# Altium PCB CPU-board-multi.PcbDoc (part 1 of 3)
Units mm, origin at the board's own origin, x right, y up, seen from the top; angles counter-clockwise.
Board outline 100 x 66.22 mm, 6 copper layers (L1, Power, L2, L3, CommonGND, L4), stack 2.134 mm thick; 307 components, 215 nets, 1002 pads, 415 vias.
Unrouted connection lines stored in the file: 11.
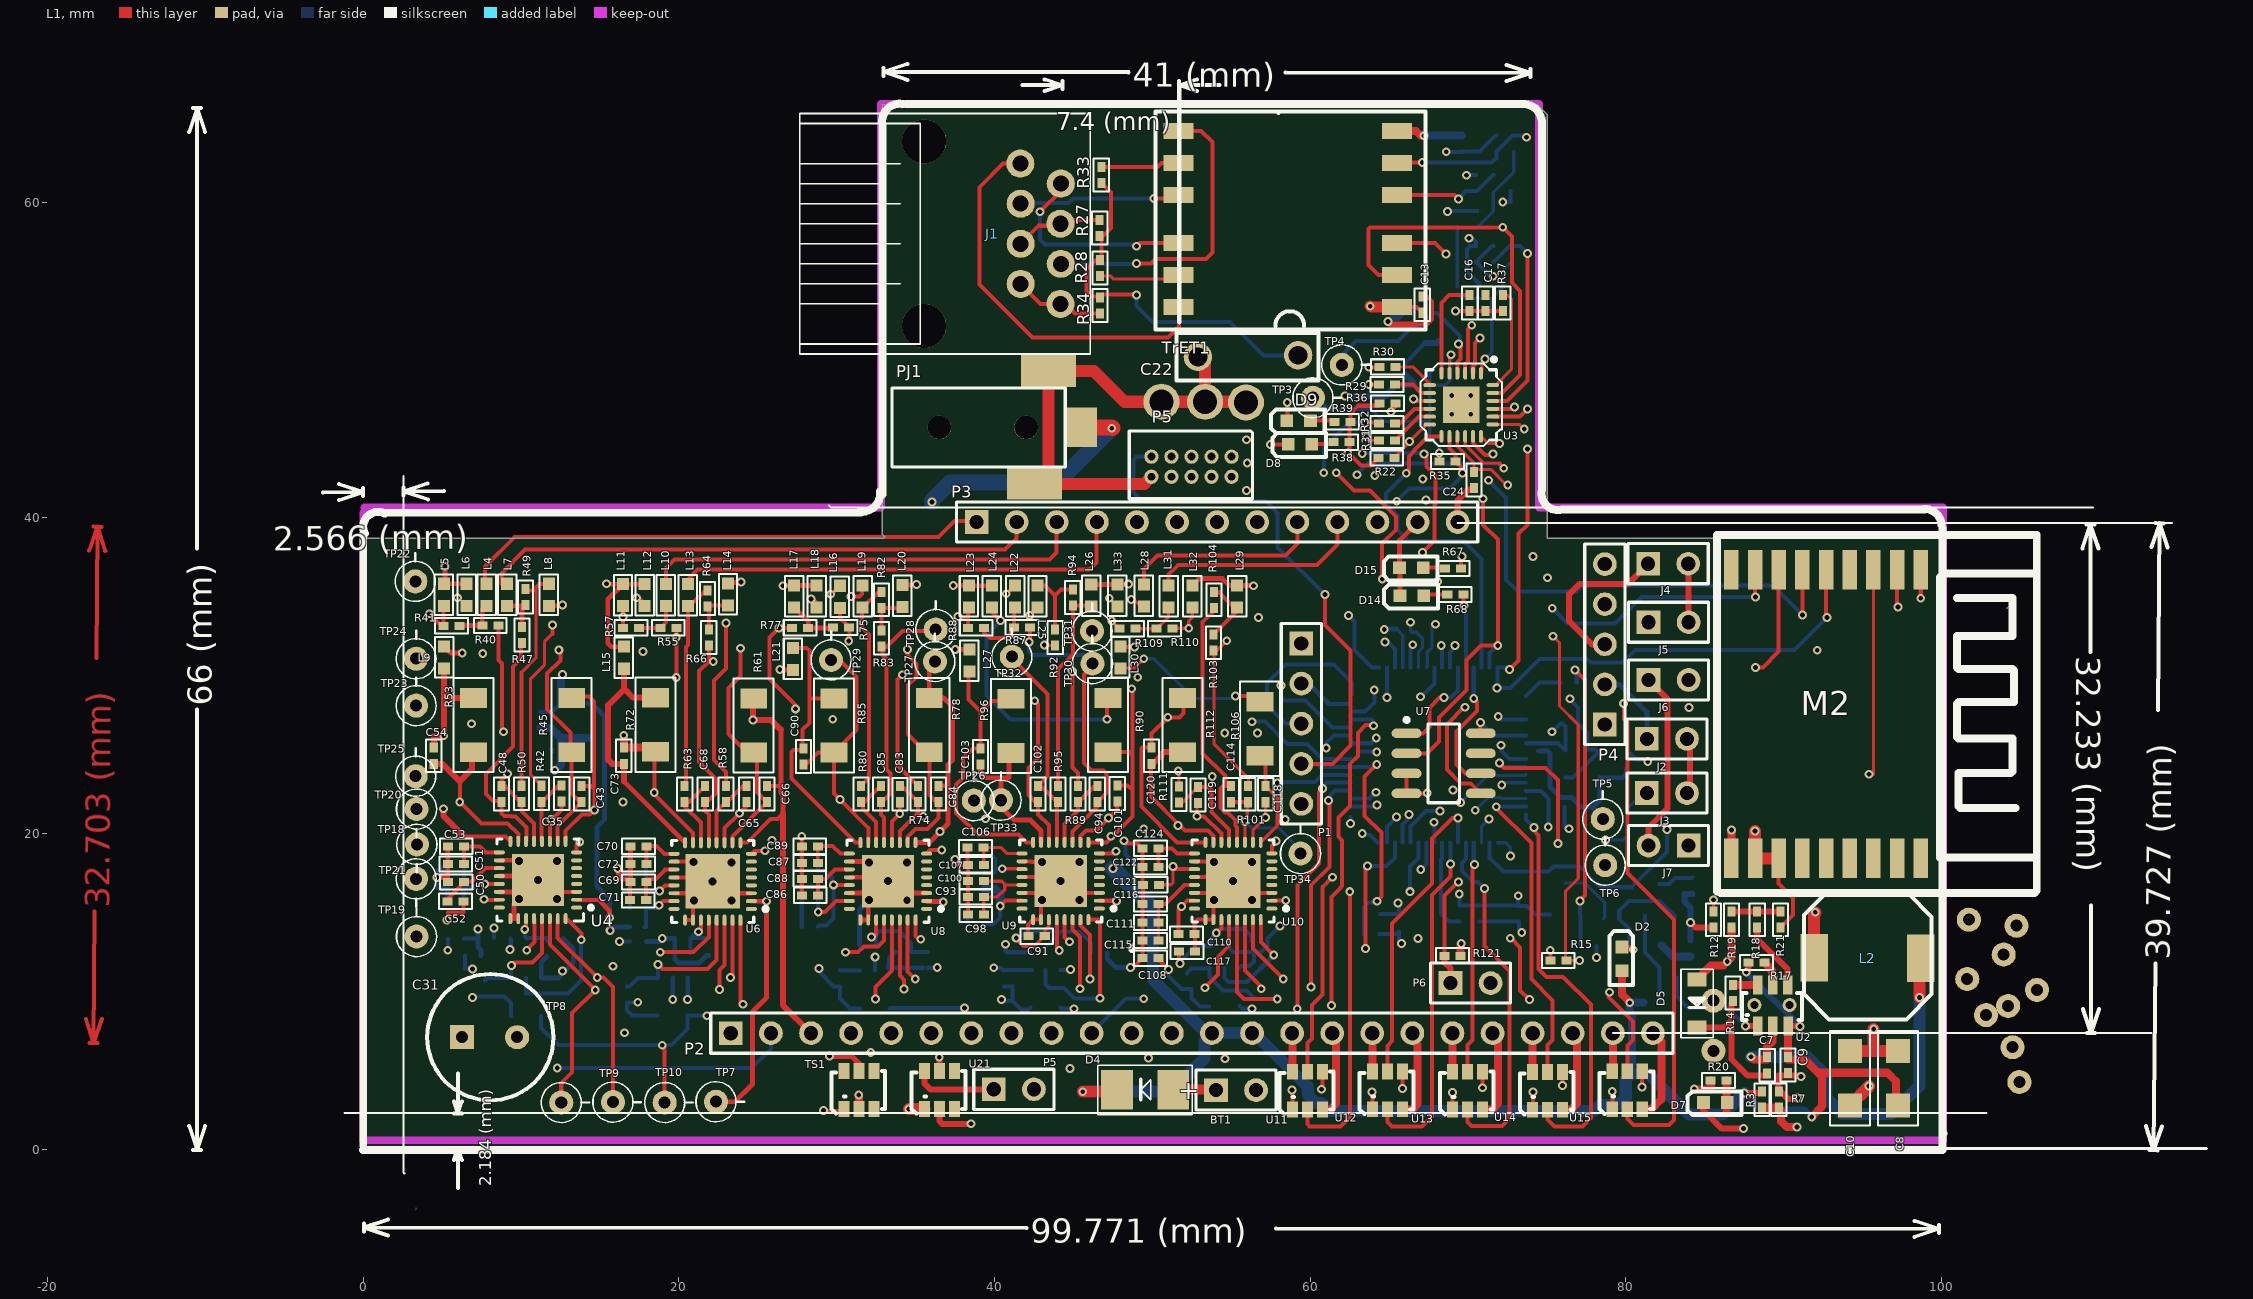
[diagram p0: L1 view]
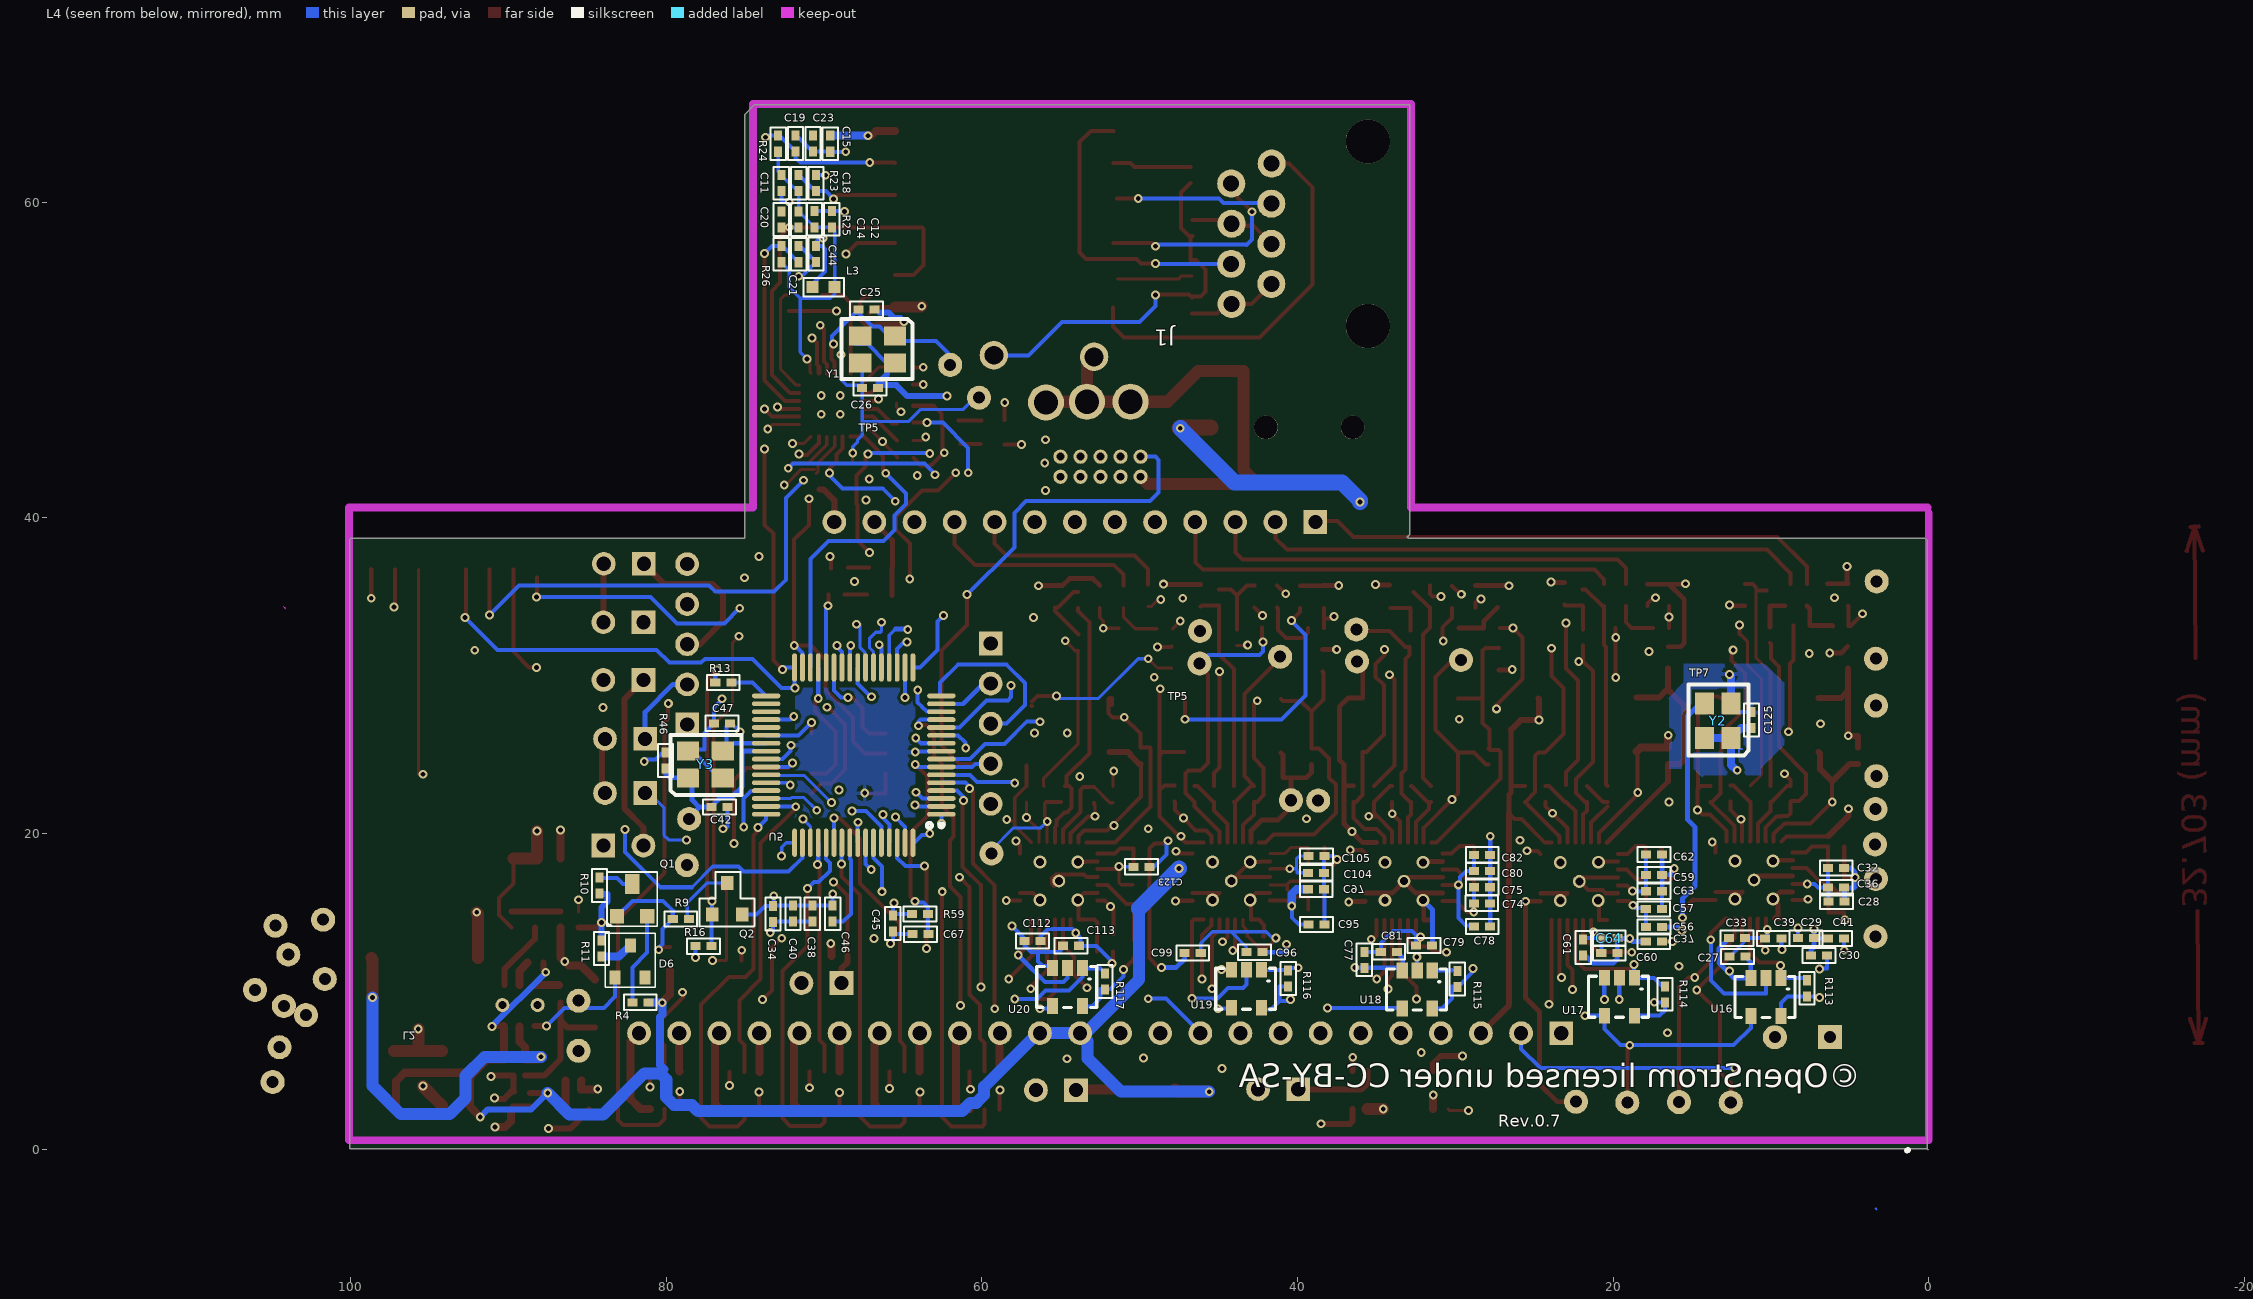
[diagram p1: L4 view, seen from below]
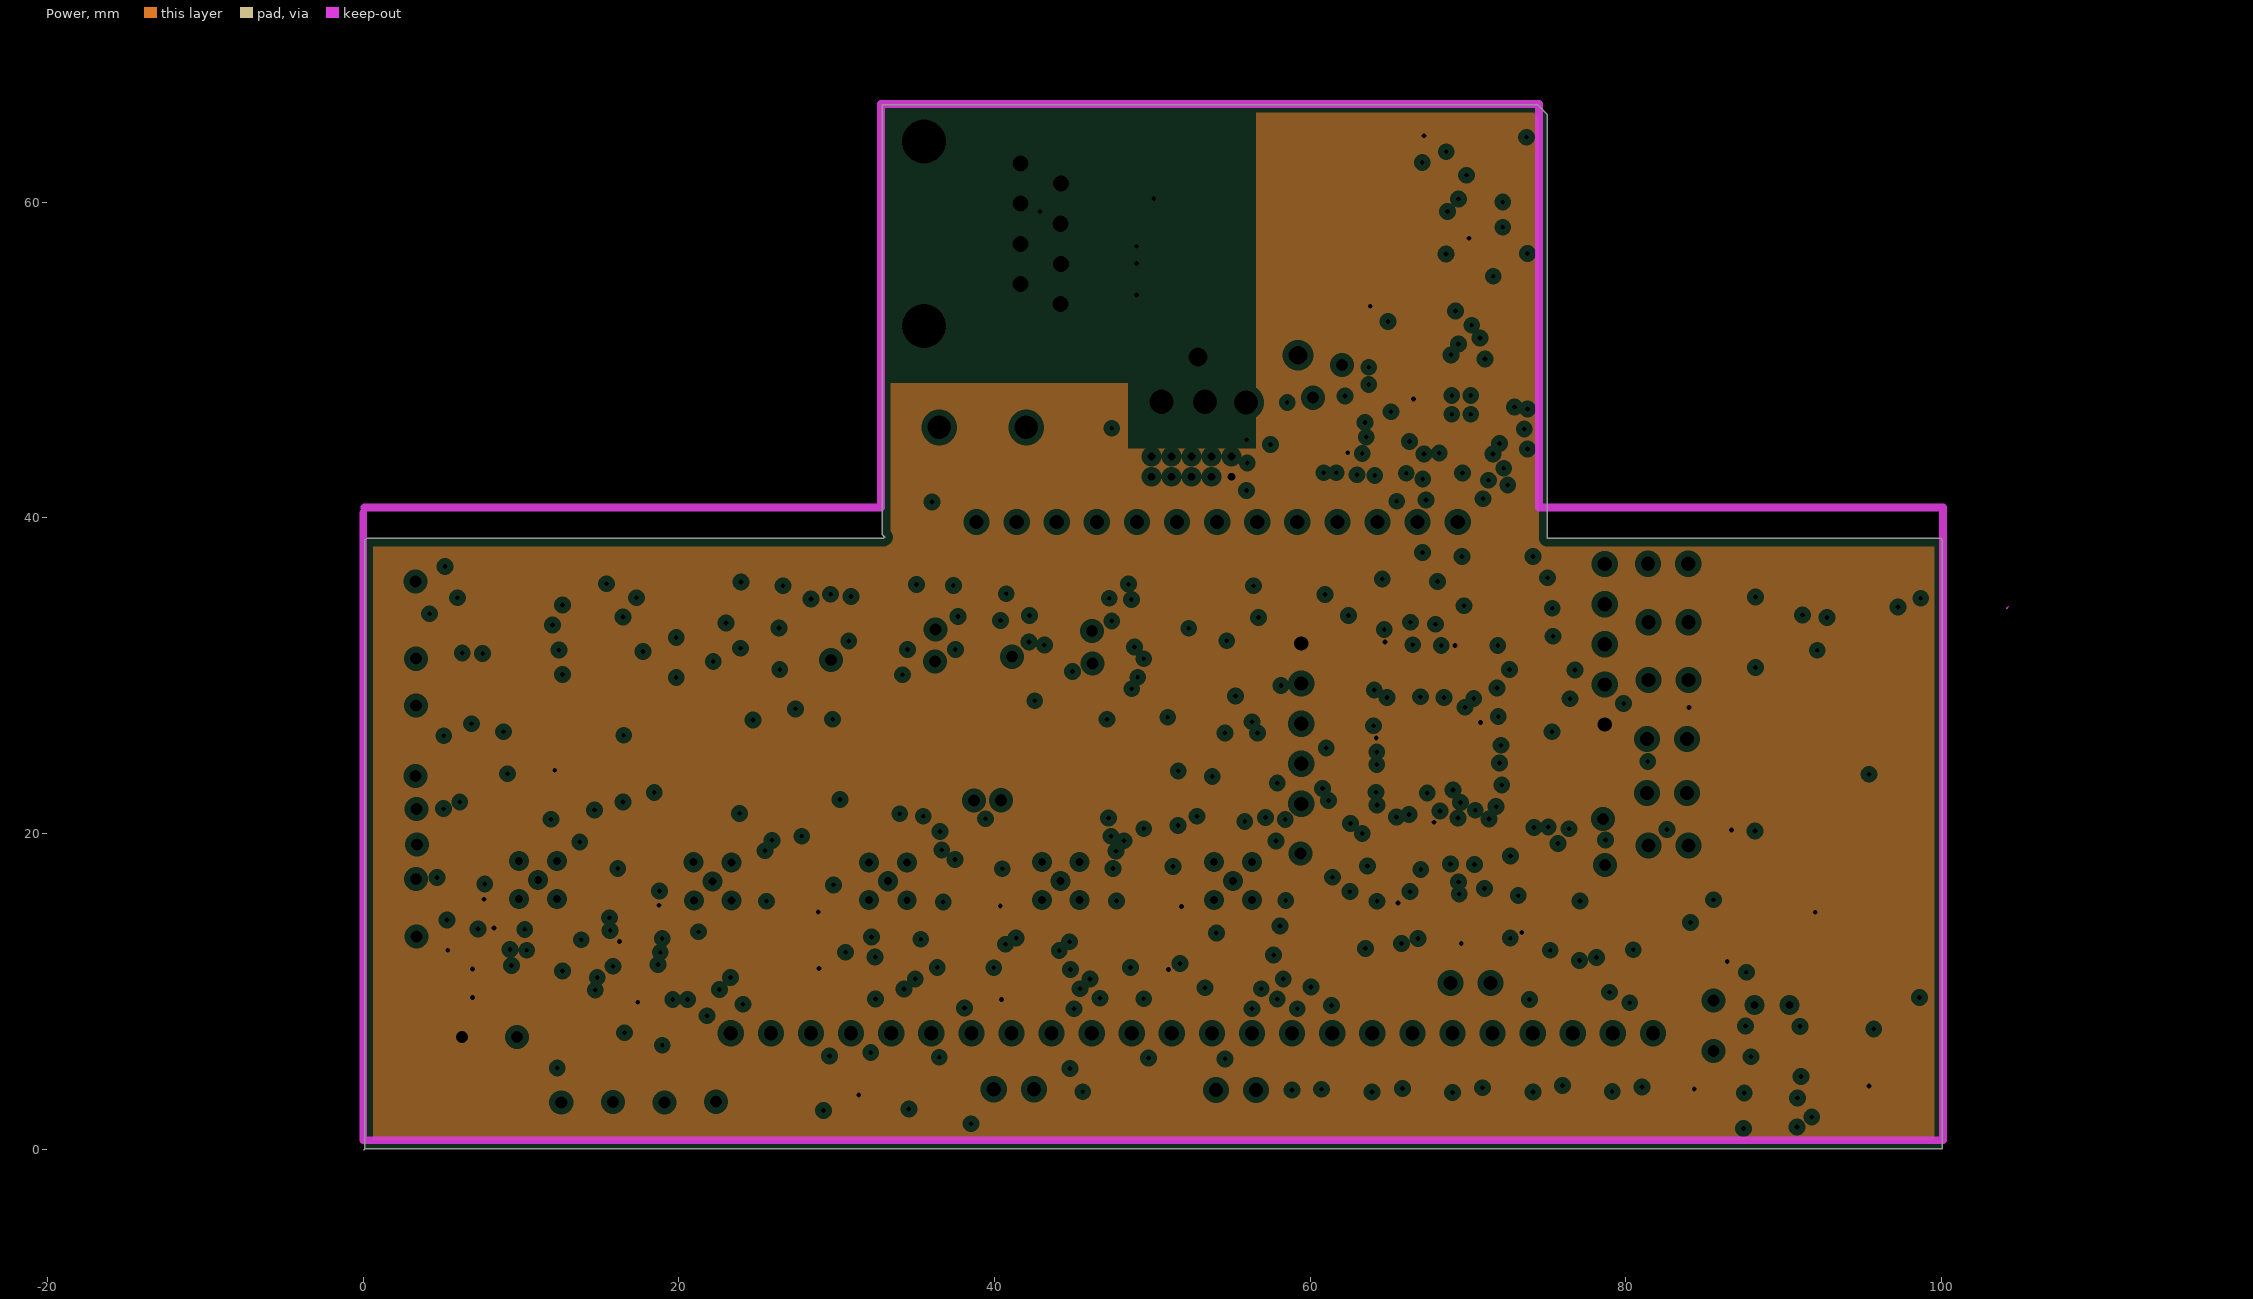
[diagram p2: Power, clearances drawn from the general rule]
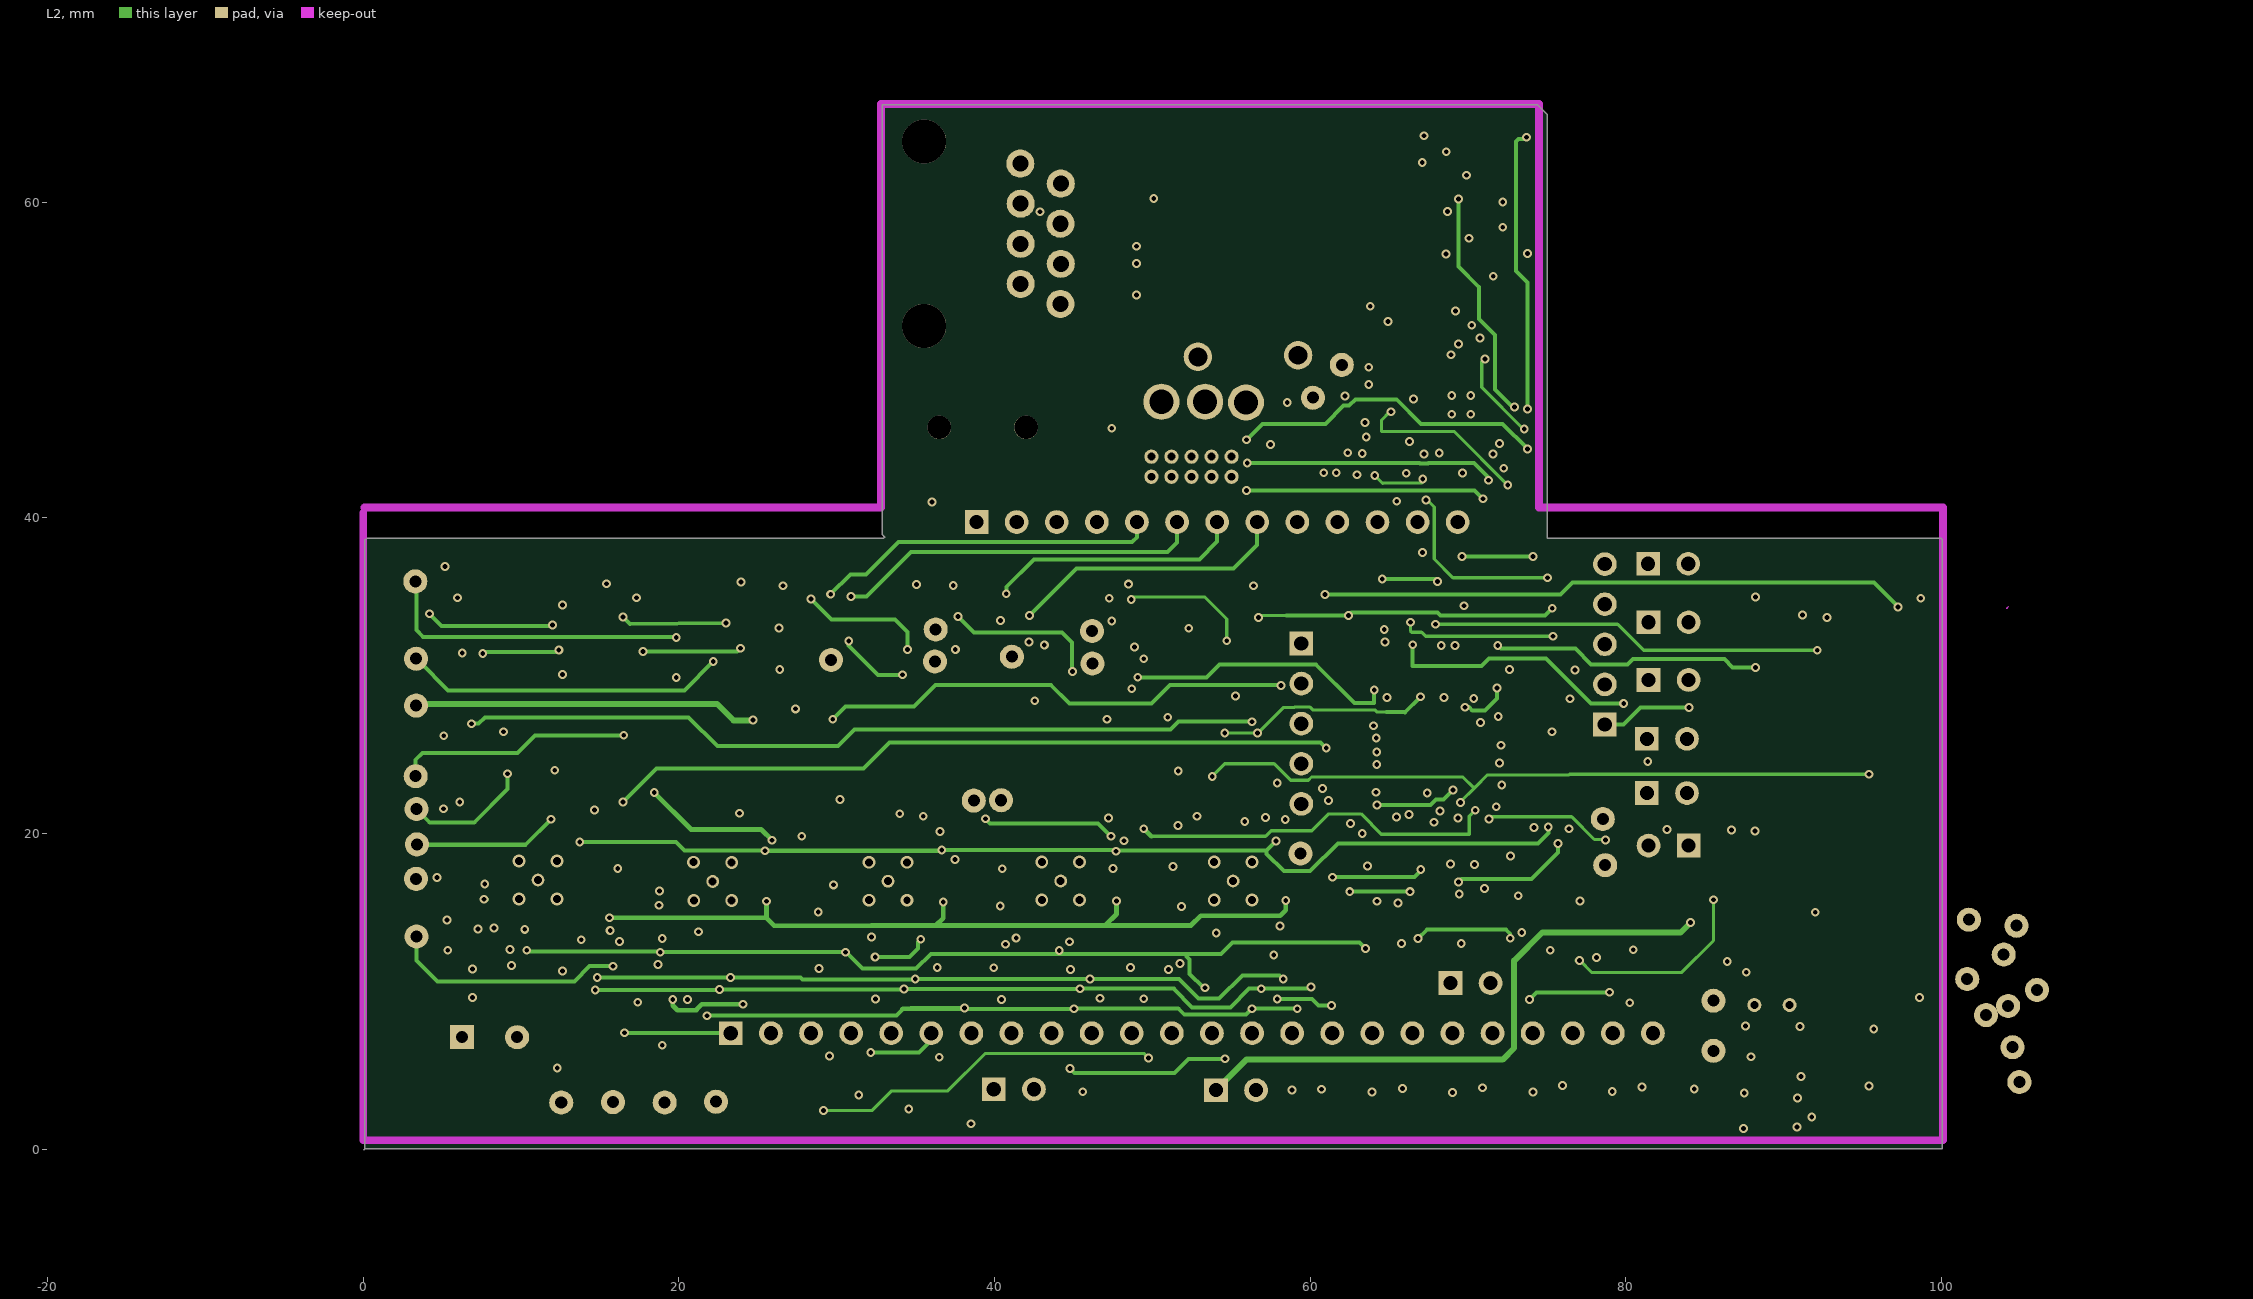
[diagram p3: L2]
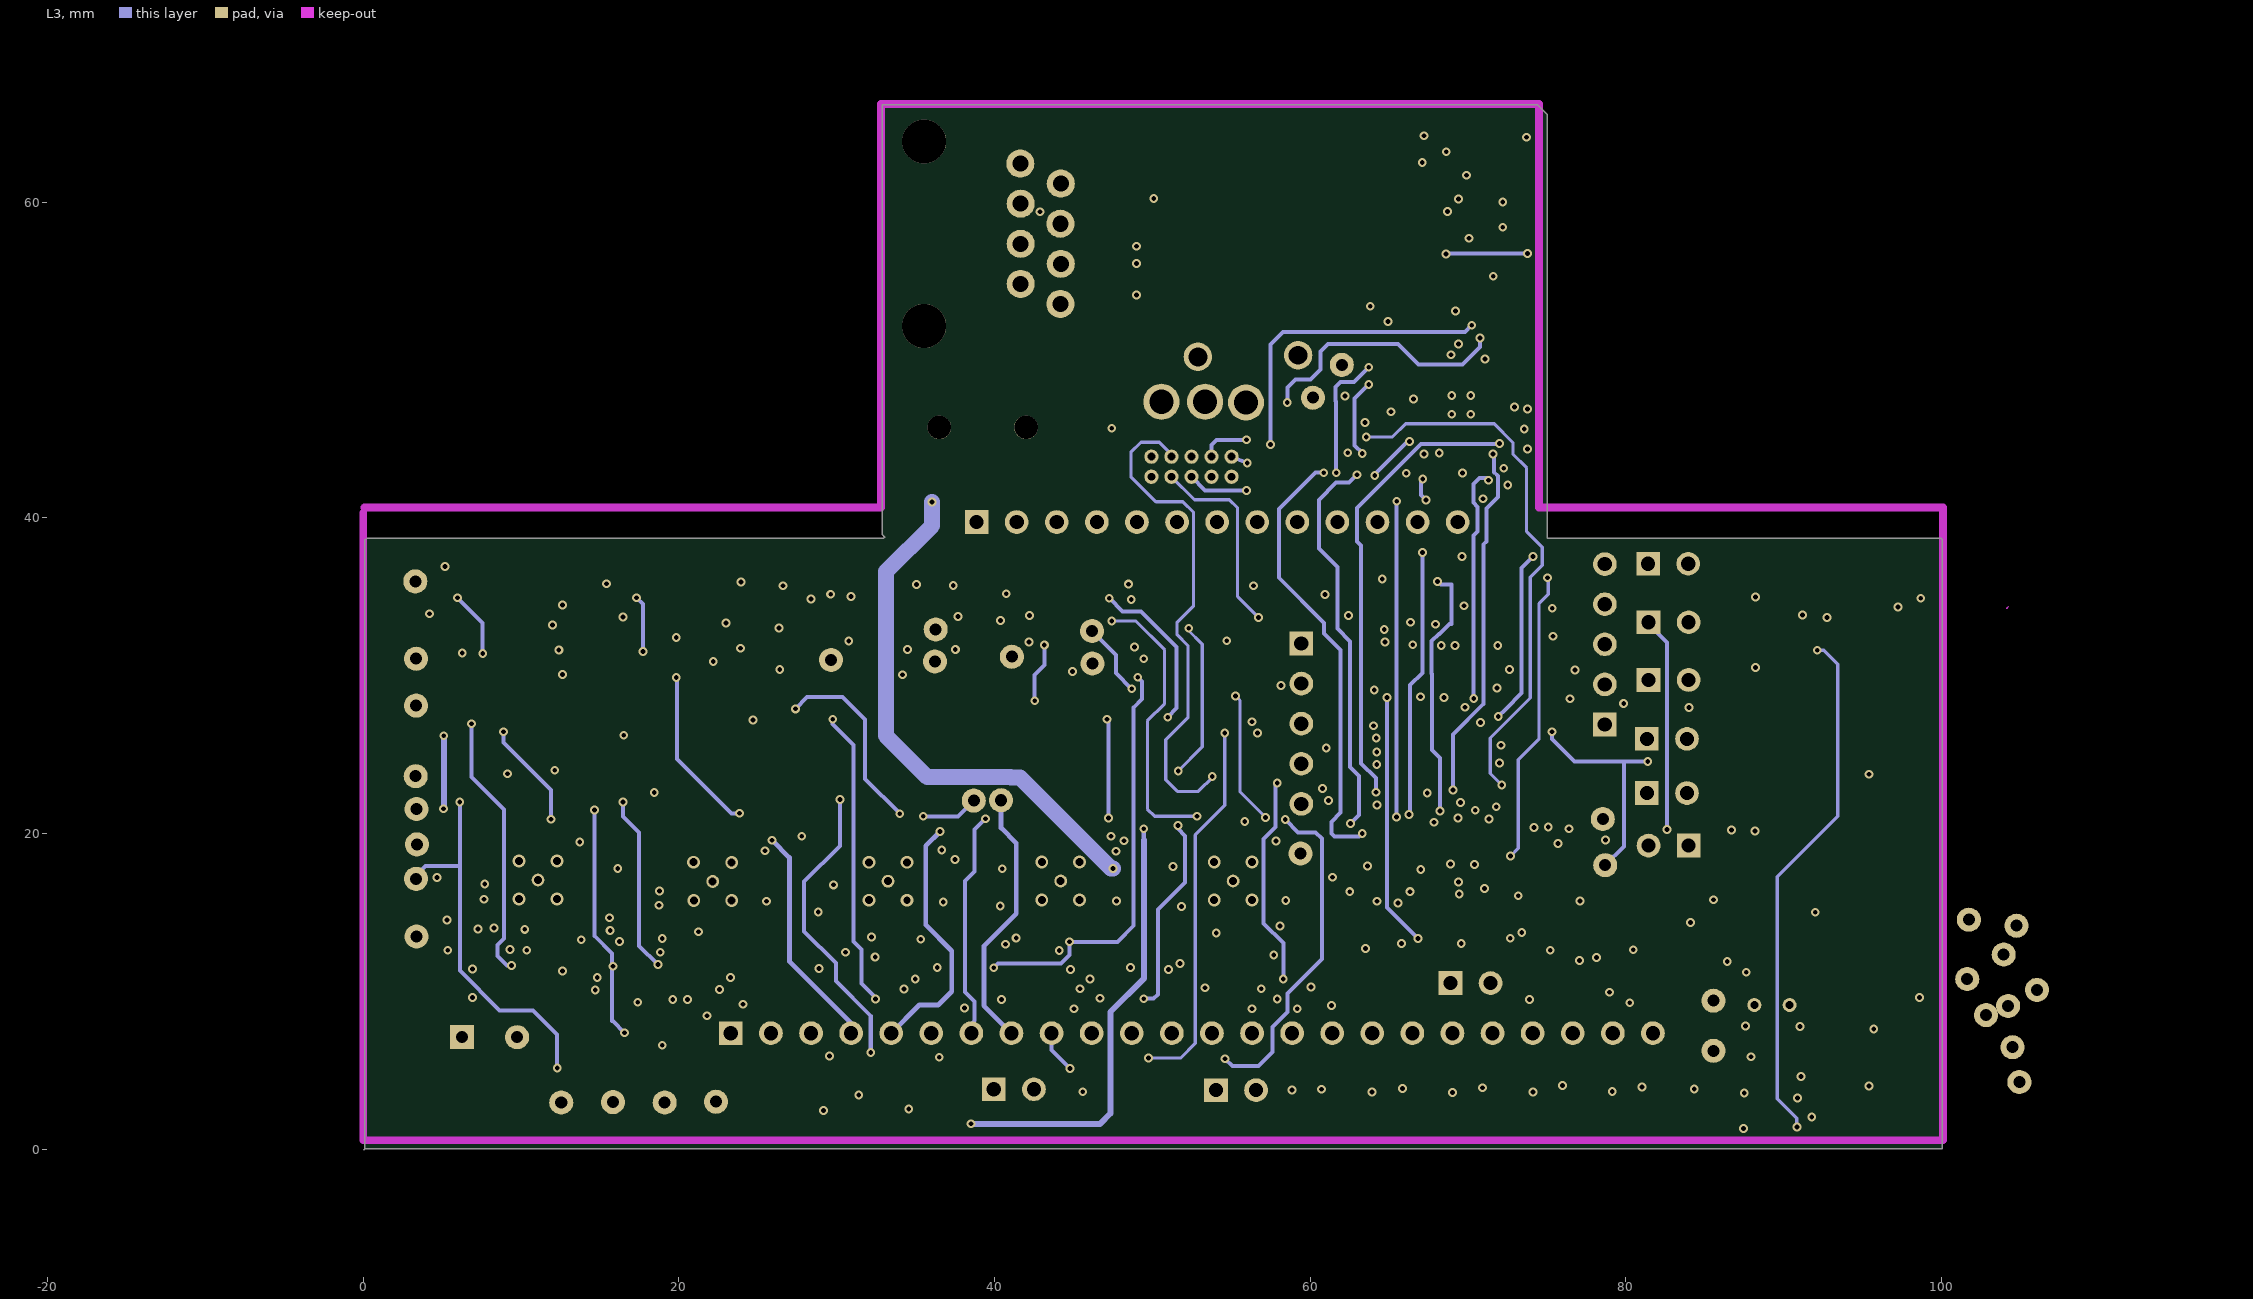
[diagram p4: L3]
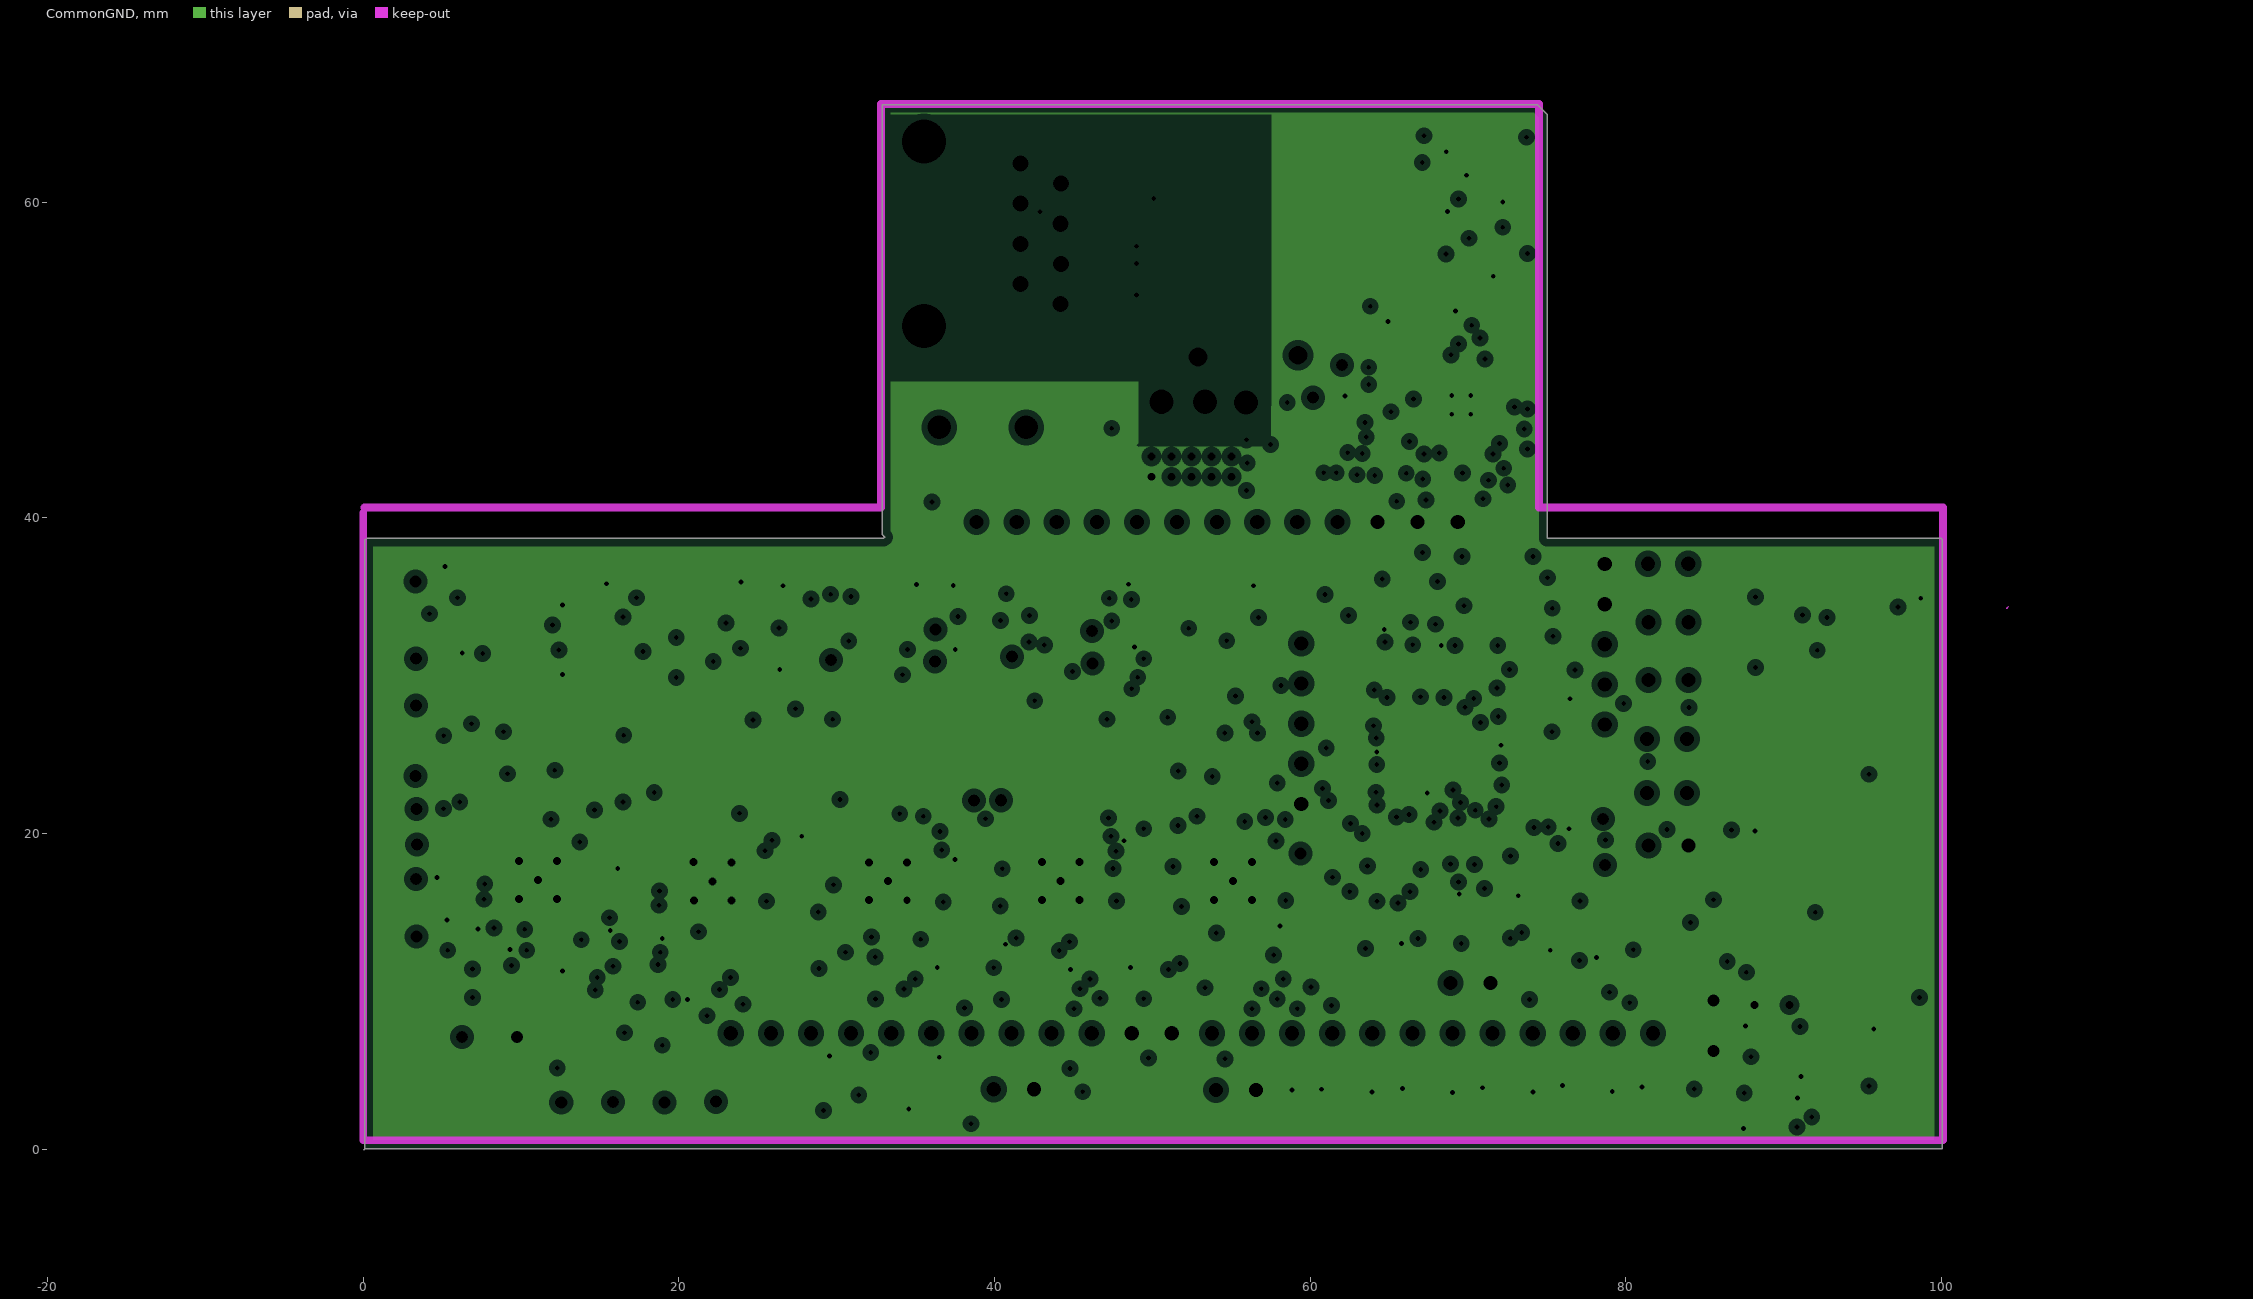
[diagram p5: CommonGND, clearances drawn from the general rule]

## Layer stack, top to bottom
L1: signal copper 0.0356
Dielectric: core 0.32, FR-4, Dk 4.8
Power: plane copper 0.0356, net VCC=3.3V
Dielectric: prepreg 0.32, FR-4, Dk 4.8
L2: signal copper 0.0356
Dielectric: core 0.32, FR-4, Dk 4.8
L3: signal copper 0.0356
Dielectric: prepreg 0.6401, FR-4, Dk 4.8
CommonGND: plane copper 0.0356, net GND
Dielectric: core 0.32, FR-4, Dk 4.8
L4: signal copper 0.0356

## Board outline
0.254,38.684 32.969,38.684 33.045,38.76 32.893,38.913 32.893,66.167 74.397,66.167 74.625,65.938 75.006,65.557 75.006,38.684 99.974,38.684 100.051,38.608 100.051,0.025 0.127,0.025 0.051,-0.051 0.102,0 0.102,38.608
cut-out: 104.14,34.239 104.14,34.29 104.216,34.366

## Design rules (kind name [scope] priority, off if disabled: settings)
Clearance [All] p1: gap=0.198
HoleSize [All] p1: absolutevalues=TRUE maxlimit=7.62 minlimit=0.025 maxpercent=80.000 minpercent=20.000
PlaneClearance [All] p1: clearance=0.381
PlaneConnect [All] p1: planeconnectstyle=Relief reliefexpansion=0.254 reliefentries=4 reliefconductorwidth=0.127 reliefairgap=0.127
PolygonConnect [All] p1: connectstyle=Relief reliefconductorwidth=0.254 reliefentries=4 polygonreliefangle="90 Angle" airgapwidth=0.254
RoutingVias ThruVia [((StartLayer='L1')and (StopLayer='L4')) or ((StartLayer='L2')and (StopLayer='L3'))  or ((StartLayer='L1-2')and (StopLayer='L3')) or ((StartLayer='L1')and (StopLayer='L2'))or  ((StartLayer='L3')and (StopLayer='L4')) or ((StartLayer='L1')and (StopLayer='L3')) or ((StartLayer='L1')and (StopLayer='L1-2')) or ((StartLayer='L4')and (StopLayer='L3')) or ((StartLayer='L1-2')and (StopLayer='L4')) or ((StartLayer='L2')and (StopLayer='L4')) or ((StartLayer='L1-2')and (StopLayer='L2'))] p1: holewidth=0.305 width=0.559 viastyle="Through Hole" minholewidth=0.254 minwidth=0.508 maxholewidth=0.305 maxwidth=0.559
SMDNeckDown [All] p1: percent=40.000
SolderMaskExpansion [All] p1: expansion=0.102
Width [All] p1: maxlimit=1.27 minlimit=0.203 preferedwidth=0.254
25 further rules are at their usual default settings.

## Classes and differential pairs
component class CPU-board-Sheet1-multi: BT1 C7 C8 C9 C10 C11 C12 C13 C14 C15 C16 C17 C18 C19 C20 C21 C22 C23 C25 C26 D2 D4 D5 D6 D7 D8 D9 J1 L2 L3 PJ1 Q1 Q2 R3 R4 R7 R9 R10 R11 R12 R13 R14 R15 R16 R17 R18 R19 R20 R21 R22 R23 R24 R25 R26 R27 R28 R29 R30 R31 R32 R33 R34 R36 R37 R38 R39 TP3 TP4 TrET1 U2 U3
component class CPU-board-Sheet2-multi: C27 C28 C29 C30 C31 C32 C33 C34 C35 C36 C37 C38 C39 C40 C41 C42 C43 C44 C45 C46 C47 C48 C50 C51 C52 C53 C54 C56 C57 C59 C60 C61 C62 C63 C64 C65 C66 C67 C68 C69 C70 C71 C72 C73 C74 C75 C77 C78 C79 C80 C81 C82 C83 C84 C85 C86 C87 C88 C89 C90 C125 D14 D15 J2 J4 J5 J6 J7 L4 L5 L6 L7 L8 L9 L10 L11 L12 L13 L14 L15 L16 L17 L18 L19 L20 L21 P1 P2 P3 P4 R40 R41 R42 R45 R46 R47 R49 R50 R53 R55 R57 R58 R59 R61 R63 R64 R66 R67 R68 R72 R74 R75 R77 R78 R80 R82 R83 R85 R113 R114 R115 TP5 TP6 TP7 TP8 TP9 TP10 TP18 TP19 TP20 TP21 TP22 TP23 TP24 TP25 TP26 TP27 TP28 TP29 U4 U5 U6 U7 U8 U11 U12 U13 U14 U15 U16 U17 U18 Y2 Y3
component class CPU-board-Sheet3-multi: C91 C93 C94 C95 C96 C97 C98 C99 C100 C101 C102 C103 C104 C105 C106 C107 C108 C110 C111 C112 C113 C114 C115 C116 C117 C118 C119 C120 C121 C122 C123 C124 L22 L23 L24 L25 L26 L27 L28 L29 L30 L31 L32 L33 M2 P5 R87 R88 R89 R90 R92 R94 R95 R96 R101 R103 R104 R106 R109 R110 R111 R112 R116 R117 TP30 TP31 TP32 TP33 TP34 U9 U10 U19 U20

## Components (designator, comment, footprint, x,y, rotation, side; value= is the part's Value field where it differs from the comment)
BT1 "9.0V" BAT-2 55.296,3.734 r0 top
C7 "1uF/6.3V" 0402C-GENERIC 88.951,5.817 r270 top
C8 "22uF" 1206C-GENERIC 97.231,2.769 r90 top
C9 "100nF/35V" 0402C-GENERIC 90.272,5.842 r270 top
C10 "22uF/6.3V" 1206C-GENERIC 94.209,2.769 r90 top
C11 "100nF/35V" 0402C-GENERIC 72.7,61.7 r270 bottom
C12 "10uF/6.3V" 0402C-GENERIC 69.5,58.4 r90 bottom
C13 "100nF/35V" 0402C-GENERIC 67.1,52.984 r90 top
C14 "100nF/35V" 0402C-GENERIC 70.6,58.4 r90 bottom
C15 "10uF/6.3V" 0402C-GENERIC 69.6,64.2 r270 bottom
C16 "1uF/16V" 0402C-GENERIC 70.1,53.084 r90 top
C17 "470pF" 0402C-GENERIC 71.1,54.1 r270 top
C18 "10pF/50V" 0402C-GENERIC 70.5,60.684 r90 bottom
C19 "10pF/50V" 0402C-GENERIC 71.8,63.2 r90 bottom
C20 "10pF/50V" 0402C-GENERIC 72.7,58.384 r90 bottom
C21 "10pF/50V" 0402C-GENERIC 71.6,56.184 r90 bottom
C22 "Comment" "HiVoltCapacitor 470pF/6kV" 59.233,50.29 r180 top
C23 "22nF/16V" 0402C-GENERIC 70.7,64.216 r270 bottom
C24 "" 0402C-GENERIC 70.383,42.901 r270 top
C25 "18pF/6.3V" 0402C-GENERIC 67.8,53.2 r180 bottom
C26 "18pF/6.3V" 0402C-GENERIC 67.589,48.209 r180 bottom
C27 "100nF/10V" 0402C-GENERIC 12.624,12.192 r180 bottom
C28 "1uF/6.3V" 0402C-GENERIC 6.35,15.697 r180 bottom
C29 "150pF/10V" 0402C-GENERIC 8.28,13.36 r180 bottom
C30 "100nF" 0402C-GENERIC 6.452,12.268 r0 bottom
C31 "470uF/6.3V" 470uF/6.3v 6.254,7.087 r0 top
C32 "150pF/10V" 0402C-GENERIC 6.375,17.805 r180 bottom
C33 "150pF/10V" 0402C-GENERIC 11.633,13.36 r0 bottom
C34 "" 0402C-GENERIC 73.228,15.392 r270 bottom
C35 "10n/16V" 0402C-GENERIC 12.573,23.038 r270 top
C36 "100nF/10V" 0402C-GENERIC 6.375,16.561 r180 bottom
C37 "100nF/6.3V" 0402R-TBD 17.932,13.157 r180 bottom
C38 "Comment" 0402C-GENERIC 70.739,14.402 r90 bottom
C39 "4.7uF/16V" 0402C-GENERIC 10.363,13.335 r180 bottom
C40 "100nF/6.3V" 0402C-GENERIC 71.958,15.418 r270 bottom
C41 "100nF/6.3V" 0402C-TBD 6.401,13.335 r180 bottom
C42 "27pF/6.3V" 0402C-GENERIC 77.114,21.666 r180 bottom
C43 "10n/16V" 0402C-GENERIC 13.843,21.996 r90 top
C44 "100nF/6.3V" 0402C-TBD 70.5,56.2 r90 bottom
C45 "100nF/6.3V" 0402C-TBD 65.634,13.792 r90 bottom
C46 "" 0402C-GENERIC 69.444,14.402 r90 bottom
C47 "27pF/6.3V" 0402C-GENERIC 75.946,26.975 r0 bottom
C48 "10n/16V" 0402C-GENERIC 8.763,23.012 r270 top
C50 "150pF" 0402C-GENERIC 6.401,16.916 r180 top
C51 "150pF" 0402C-GENERIC 6.375,18.059 r180 top
C52 "100nF" 0402C-GENERIC 6.35,15.697 r180 top
C53 "100nF" 0402C-GENERIC 6.401,19.177 r180 top
C54 "10n/16V" 0402C-GENERIC 4.47,25.425 r270 top
C56 "150pF/10V" 0402C-GENERIC 17.907,14.072 r180 bottom
C57 "100nF" 0402C-GENERIC 17.932,15.215 r180 bottom
C59 "1uF/6.3V" 0402C-GENERIC 17.907,17.374 r180 bottom
C60 "100nF" 0402C-GENERIC 20.752,12.421 r180 bottom
C61 "150pF/10V" 0402C-GENERIC 21.895,13.284 r270 bottom
C62 "150pF/10V" 0402C-GENERIC 17.907,18.669 r180 bottom
C63 "100nF" 0402C-GENERIC 17.907,16.332 r180 bottom
C64 "1uF/6.3V" 0402C-GENERIC 20.752,13.36 r180 bottom
C65 "10n/16V" 0402C-GENERIC 24.282,23.012 r270 top
C66 "10n/16V" 0402C-GENERIC 25.578,21.996 r90 top
C67 ".1uF" 0402C-TBD 63.373,13.614 r0 bottom
C68 "10n/16V" 0402C-GENERIC 21.666,21.996 r90 top
C69 "150pF" 0402C-GENERIC 17.958,16.916 r180 top
C70 "150pF" 0402C-GENERIC 17.958,19.177 r180 top
C71 "100nF" 0402C-GENERIC 17.932,15.773 r180 top
C72 "100nF" 0402C-GENERIC 17.958,18.059 r180 top
C73 "10n/16V" 0402C-GENERIC 16.51,24.409 r90 top
C74 "150pF/10V" 0402C-GENERIC 28.829,15.57 r180 bottom
C75 "100nF" 0402C-GENERIC 28.804,16.586 r180 bottom
C77 "100nF" 0402C-GENERIC 35.763,12.497 r270 bottom
C78 "Comment" 0402C-GENERIC 28.804,14.097 r180 bottom
C79 "150pF/10V" 0402C-GENERIC 32.487,12.903 r180 bottom
C80 "150pF/10V" 0402C-GENERIC 28.804,17.628 r180 bottom
C81 "1uF/6.3V" 0402C-GENERIC 34.722,12.497 r180 bottom
C82 "100nF" 0402C-GENERIC 28.804,18.644 r180 bottom
C83 "10n/16V" 0402C-GENERIC 34.011,21.971 r90 top
C84 "10n/16V" 0402C-GENERIC 36.449,21.996 r90 top
C85 "10n/16V" 0402C-GENERIC 32.791,21.996 r90 top
C86 "150pF" 0402C-GENERIC 28.829,16.078 r180 top
C87 "150pF" 0402C-GENERIC 28.804,18.136 r180 top
C88 "100nF" 0402C-GENERIC 28.804,17.12 r180 top
C89 "100nF" 0402C-GENERIC 28.804,19.177 r180 top
C90 "10n/16V" 0402C-GENERIC 27.889,25.375 r270 top
C91 "100nF" 0402C-GENERIC 43.18,13.487 r180 top
C93 "1uF/6.3V" 0402C-GENERIC 39.319,15.977 r180 top
C94 "10n/16V" 0402C-GENERIC 46.507,23.012 r270 top
C95 "100nF" 0402C-GENERIC 39.294,14.224 r180 bottom
C96 "150pF/10V" 0402C-GENERIC 43.231,12.471 r180 bottom
C97 "150pF/10V" 0402C-GENERIC 39.319,16.459 r180 bottom
C98 "150pF/10V" 0402C-GENERIC 38.303,14.859 r0 top
C99 "1uF/6.3V" 0402C-GENERIC 46.126,12.421 r0 bottom
C100 "100nF" 0402C-GENERIC 39.319,16.967 r180 top
C101 "10n/16V" 0402C-GENERIC 47.777,22.022 r90 top
C102 "10n/16V" 0402C-GENERIC 42.748,23.012 r270 top
C103 "10n/16V" 0402C-GENERIC 39.116,25.375 r270 top
C104 "150pF" 0402C-GENERIC 39.319,17.501 r180 bottom
C105 "100nF" 0402C-GENERIC 39.294,18.567 r180 bottom
C106 "150pF" 0402C-GENERIC 39.294,19.101 r180 top
C107 "100nF" 0402C-GENERIC 39.319,18.009 r180 top
C108 "150pF/10V" 0402C-GENERIC 50.394,12.09 r180 top
C110 "100nF" 0402C-GENERIC 52.68,13.614 r180 top
C111 "1uF/6.3V" 0402C-GENERIC 50.394,14.351 r180 top
C112 "100nF" 0402C-GENERIC 56.286,13.183 r0 bottom
C113 "150pF/10V" 0402C-GENERIC 53.849,12.879 r0 bottom
C114 "10n/16V" 0402C-GENERIC 54.991,22.987 r270 top
C115 "150pF/10V" 0402C-GENERIC 50.394,13.208 r180 top
C116 "100nF" 0402C-GENERIC 50.394,15.519 r180 top
C117 "1uF/6.3V" 0402C-GENERIC 51.689,12.522 r0 top
C118 "10n/16V" 0402C-GENERIC 57.175,21.971 r90 top
C119 "10n/16V" 0402C-GENERIC 52.883,22.936 r270 top
C120 "10n/16V" 0402C-GENERIC 49.936,25.425 r270 top
C121 "150pF" 0402C-GENERIC 50.419,16.739 r180 top
C122 "150pF" 0402C-GENERIC 50.394,17.882 r180 top
C123 "100nF" 0402C-GENERIC 50.394,17.882 r180 bottom
C124 "100nF" 0402C-GENERIC 50.394,19.05 r180 top
C125 "Comment" 0402C-GENERIC 11.227,27.686 r270 bottom
D2 "2V/20mA" LED-SM 79.756,11.303 r90 top
D4 "Comment" DO214AA 52.183,3.759 r0 top
D5 "1N4148" SOD-123 84.506,7.696 r90 top
D6 "9.1V" SOT23-DIODE 83.231,10.871 r90 bottom
D7 "2V/20mA" LED-SM 86.412,2.946 r180 top
D8 "2V/20mA" LED-SM 60.096,44.653 r180 top
D9 "2V/20mA" LED-SM 60.02,46.152 r180 top
D14 "LED2" LED-SM 67.184,35.052 r180 top
D15 "LED2" LED-SM 67.159,36.83 r180 top
J1 "RJ45-GENERIC" RJ45-8/8 44.171,53.543 r0 top
J2 "Header1x1" HDR1X2 81.331,25.984 r0 top
J3 "Header1x1" HDR1X2 81.331,22.555 r0 top
J4 "Header1x1" HDR1X2 81.407,37.084 r0 top
J5 "Header1x1" HDR1X2 81.432,33.376 r0 top
J6 "Header1x1" HDR1X2 81.432,29.718 r0 top
J7 "Header1x1" HDR1X2 83.972,19.228 r180 top
L2 "4.7uH/2.6A" "Murata 15uH inductor" 98.673,12.116 r180 top
L3 "FB1/120 Ohms" 0603C-2U2 70.714,54.61 r180 bottom
L4 "FeILB" 0603C-TBD 7.823,35.814 r270 top
L5 "FeILB" 0603C-TBD 5.105,35.814 r270 top
L6 "FeILB" 0603C-TBD 6.553,35.814 r270 top
L7 "FeILB" 0603C-TBD 9.119,35.814 r270 top
L8 "FeILB" 0603C-TBD 11.76,34.417 r90 top
L9 "FeILB" 0603C-TBD 5.131,31.852 r270 top
L10 "FeILB" 0603C-TBD 19.177,35.789 r270 top
L11 "FeILB" 0603C-TBD 16.459,35.789 r270 top
L12 "FeILB" 0603C-TBD 17.831,35.789 r270 top
L13 "FeILB" 0603C-TBD 20.574,35.789 r270 top
L14 "FeILB" 0603C-TBD 23.114,35.839 r270 top
L15 "FeILB" 0603C-TBD 16.51,31.826 r270 top
L16 "FeILB" 0603C-TBD 30.201,35.687 r270 top
L17 "FeILB" 0603C-TBD 27.305,35.712 r270 top
L18 "FeILB" 0603C-TBD 28.727,35.712 r270 top
L19 "FeILB" 0603C-TBD 31.646,35.712 r270 top
L20 "FeILB" 0603C-TBD 34.163,35.738 r270 top
L21 "FeILB" 0603C-TBD 27.229,30.353 r90 top
L22 "FeILB" 0603C-TBD 41.3,35.712 r270 top
L23 "FeILB" 0603C-TBD 38.379,35.712 r270 top
L24 "FeILB" 0603C-TBD 39.827,35.712 r270 top
L25 "FeILB" 0603C-TBD 42.723,34.315 r90 top
L26 "FeILB" 0603C-TBD 46.126,35.763 r270 top
L27 "FeILB" 0603C-TBD 38.405,31.648 r270 top
L28 "FeILB" 0603C-TBD 49.454,35.763 r270 top
L29 "FeILB" 0603C-TBD 55.372,35.712 r270 top
L30 "FeILB" 0603C-TBD 47.981,31.852 r270 top
L31 "FeILB" 0603C-TBD 51.029,35.712 r270 top
L32 "FeILB" 0603C-TBD 52.527,35.712 r270 top
L33 "FeILB" 0603C-TBD 47.777,35.763 r270 top
M2 "ESP 8266" ESP8266WROOm-02 85.782,36.715 r270 top (schematic designator M1)
P1 "Header 5" HDR1X5 59.436,32.029 r270 top
P2 "Header 24" HDR1X24 23.292,7.341 r0 top
P3 "Header 13" HDR1X13 38.862,39.726 r0 top
P4 "Header 5" HDR1X5 78.664,26.899 r90 top
P5 "Header 2" HDR1X2 39.954,3.785 r0 top
P5 "Header 5X2" "Header2x5 1.27mm pitch" 49.936,42.596 r0 top
P6 "Header 2" HDR1X2 68.885,10.516 r0 top
PJ1 "PWR2.5" "Female Plug" 36.5,45.72 r0 top
Q1 "MMBT3906" SOT23-BCE 83.109,14.757 r90 bottom (schematic designator Q4)
Q2 "Comment" MMBT2222 77.084,14.859 r180 bottom
R3 "100K" 0402R-TBD 88.621,2.616 r90 top
R4 "47R" 0402R-TBD 82.144,9.296 r180 bottom
R7 "27K" 0402R-TBD 89.687,3.632 r270 top
R9 "1K" 0402R-TBD 78.562,14.58 r0 bottom
R10 "10R" 0402R-TBD 84.226,16.18 r90 bottom
R11 "10R" 0402R-TBD 84.099,12.192 r90 bottom
R12 "57.6K" 0402R-TBD 85.547,15.037 r270 top
R13 "10K" 0402R-TBD 76.886,29.566 r180 bottom
R14 "0/125W" 0402C-GENERIC 86.792,9.373 r90 top
R15 "27K" 0402R-TBD 75.209,11.938 r0 top
R16 "Comment" 0402C-GENERIC 78.13,12.852 r180 bottom
R17 "10K" 0402R-TBD 88.773,11.811 r180 top
R18 "75K/1%/.125W" 0402C-TBD 88.316,15.037 r270 top
R19 "40.2K/1%/.125W" 0402R-TBD 86.69,14.021 r90 top
R20 "47" 0402R-TBD 85.369,4.343 r0 top
R21 "13K" 0402R-TBD 89.789,14.021 r90 top
R22 "1.5K" 0402R-TBD 65.354,43.79 r180 top
R23 "49.9" 0402R-TBD 71.6,61.7 r270 bottom
R24 "49.9" 0402R-TBD 72.9,64.2 r270 bottom
R25 "49.9" 0402R-TBD 71.6,58.384 r90 bottom
R26 "49.9" 0402R-TBD 72.7,57.2 r270 bottom
R27 "75/1%/.125W" 0402R-TBD 46.66,58.852 r270 top
R28 "75/1%/.125W" 0402R-TBD 46.685,56.337 r270 top
R29 "100" 0402R-TBD 65.38,48.438 r180 top
R30 "100" 0402R-TBD 65.405,49.555 r180 top
R31 "100" 0402R-TBD 65.38,44.882 r180 top
R32 "100" 0402R-TBD 65.38,45.974 r180 top
R33 "75/1%/.125W" 0402R-TBD 46.761,61.214 r90 top
R34 "75/1%/.125W" 0402R-TBD 46.685,52.934 r90 top
R35 "" 0402C-GENERIC 69.215,43.561 r180 top
R36 "4.7k" 0402R-TBD 65.405,47.244 r180 top
R37 "12.1k" 0402R-TBD 72.2,53.084 r90 top
R38 "47" 0402R-TBD 61.468,44.78 r0 top
R39 "47" 0402R-TBD 61.544,46.076 r0 top
R40 "220R" 0402R-TBD 8.56,33.172 r180 top
R41 "18.7" 0402R-TBD 5.08,33.147 r0 top
R42 "220R" 0402R-TBD 11.303,22 r90 top
R45 "470/1%/.250W" 1206FB-GENERIC 13.208,28.575 r270 top
R46 "1M" 0402R-TBD 80.035,25.121 r270 bottom
R47 "220R" 0402R-TBD 10.058,32.055 r90 top
R49 "18.7" 0402R-TBD 10.287,35.484 r270 top
R50 "220R" 0402R-TBD 10.033,22 r90 top
R53 "470/1%/.250W" 1206FB-GENERIC 6.985,25.146 r90 top
R55 "220R" 0402R-TBD 19.837,33.02 r180 top
R57 "18.7" 0402R-TBD 16.459,33.02 r0 top
R58 "220R" 0402R-TBD 22.987,21.996 r90 top
R59 "10k" 0402R-TBD 63.398,14.884 r0 bottom
R61 "470/1%/.250W" 1206FB-GENERIC 24.74,28.55 r270 top
R63 "220R" 0402R-TBD 20.371,21.996 r90 top
R64 "18.7" 0402R-TBD 21.819,34.366 r90 top
R66 "220R" 0402R-TBD 21.895,31.902 r90 top
R67 "220R" 0402R-TBD 69.545,36.779 r180 top
R68 "220R" 0402R-TBD 69.698,35.128 r180 top
R72 "470/1%/.250W" 1206FB-GENERIC 18.517,25.171 r90 top
R74 "220R" 0402R-TBD 35.154,21.996 r90 top
R75 "18.7" 0402R-TBD 29.769,33.045 r0 top
R77 "220R" 0402R-TBD 27.178,33.02 r0 top
R78 "470/1%/.250W" 1206FB-GENERIC 35.865,28.575 r270 top
R80 "220R" 0402R-TBD 31.547,21.996 r90 top
R82 "18.7" 0402R-TBD 32.842,34.29 r90 top
R83 "220R" 0402R-TBD 32.842,31.852 r90 top
R85 "470/1%/.250W" 1206FB-GENERIC 29.82,25.121 r90 top
R87 "220R" 0402R-TBD 42.24,33.045 r180 top
R88 "18.7" 0402R-TBD 38.329,33.02 r0 top
R89 "220R" 0402R-TBD 45.288,21.996 r90 top
R90 "470/1%/.250W" 1206FB-GENERIC 47.193,25.146 r90 top
R92 "220R" 0402R-TBD 43.84,31.902 r90 top
R94 "18.7" 0402R-TBD 44.958,34.442 r90 top
R95 "220R" 0402R-TBD 44.018,21.996 r90 top
R96 "470/1%/.250W" 1206FB-GENERIC 41.046,25.095 r90 top
R101 "220R" 0402R-TBD 56.058,21.971 r90 top
R103 "18.7" 0402R-TBD 53.873,32.588 r270 top
R104 "220R" 0402R-TBD 53.899,34.29 r90 top
R106 "470/1%/.250W" 1206FB-GENERIC 56.82,24.917 r90 top
R109 "220R" 0402R-TBD 47.904,32.969 r0 top
R110 "18.7" 0402R-TBD 51.283,32.969 r180 top
R111 "220R" 0402R-TBD 51.689,21.946 r90 top
R112 "470/1%/.250W" 1206FB-GENERIC 51.918,25.146 r90 top
R113 "10K/" 0402C-GENERIC 7.722,9.677 r90 bottom
R114 "10K" 0402C-GENERIC 16.713,9.296 r90 bottom
R115 "10K" 0402C-GENERIC 29.87,10.262 r90 bottom
R116 "10K" 0402C-GENERIC 40.589,10.287 r90 bottom
R117 "10K" 0402C-GENERIC 52.197,10.109 r90 bottom
R121 "10K" 0402R-TBD 69.52,12.243 r180 top
TP3 "TESTPOINT" TESTPOINT 60.173,47.6 r0 top
TP4 "TESTPOINT" TESTPOINT 62.001,49.682 r0 top
TP5 "TESTPOINT" TESTPOINT 78.537,20.904 r90 top
TP6 "TESTPOINT" TESTPOINT 78.689,17.983 r90 top
TP7 "TESTPOINT" TESTPOINT 22.352,2.997 r0 top
TP8 "TESTPOINT" TESTPOINT 12.548,2.946 r0 top
TP9 "TESTPOINT" TESTPOINT 15.824,2.972 r0 top
TP10 "TESTPOINT" TESTPOINT 19.101,2.946 r0 top
TP18 "TESTPOINT" TESTPOINT 3.404,19.304 r270 top
TP19 "TESTPOINT" TESTPOINT 3.378,13.462 r90 top
TP20 "TESTPOINT" TESTPOINT 3.378,21.539 r270 top
TP21 "TESTPOINT" TESTPOINT 3.353,17.12 r270 top
TP22 "TESTPOINT" TESTPOINT 3.302,35.966 r90 top
TP23 "TESTPOINT" TESTPOINT 3.353,28.092 r90 top
TP24 "TESTPOINT" TESTPOINT 3.353,31.064 r90 top
TP25 "TESTPOINT" TESTPOINT 3.327,23.622 r90 top
TP26 "TESTPOINT" TESTPOINT 38.684,22.073 r90 top
TP27 "TESTPOINT" TESTPOINT 36.22,30.886 r90 top
TP28 "TESTPOINT" TESTPOINT 36.271,32.918 r90 top
TP29 "TESTPOINT" TESTPOINT 29.642,30.988 r90 top
TP30 "TESTPOINT" TESTPOINT 46.203,30.759 r90 top
TP31 "TESTPOINT" TESTPOINT 46.177,32.817 r90 top
TP32 "TESTPOINT" TESTPOINT 41.097,31.191 r90 top
TP33 "TESTPOINT" TESTPOINT 40.411,22.098 r90 top
TP34 "TESTPOINT" TESTPOINT 59.385,18.72 r90 top
TrET1 "HX1224NL" HX1224-NL 65.5,53.336 r90 top
TS1 "PTC TPM37" SOIC-5 30.46,2.54 r90 top
U2 "MP1470" MP1470 88.346,7.789 r0 top
U3 "LAN8720" QFN24_4X4_N 69.567,47.149 r270 top
U4 "STPM34" 32M1-A_L#1 11.074,17.043 r180 top
U5 "PIC32MX795" TQFP-PT64_N 68.11,24.959 r0 bottom
U6 "STPM34" 32M1-A_L#2 22.145,16.956 r180 top
U7 "W25Q16DVZP" SO8_L 68.453,24.435 r0 top
U8 "STPM34" 32M1-A_L#1 33.249,16.967 r180 top
U9 "STPM34" 32M1-A_L#1 44.192,16.981 r180 top
U10 "STPM34" 32M1-A_L#2 55.115,16.981 r180 top
U11 "NUD312D" NUD3112D 58.867,2.502 r90 top
U12 "NUD312D" NUD3112D 63.937,2.515 r90 top
U13 "NUD312D" NUD3112D 69.027,2.502 r90 top
U14 "NUD312D" NUD3112D 74.082,2.489 r90 top
U15 "NUD312D" NUD3112D 79.136,2.528 r90 top
U16 "NL17SZ125" NZ17SZ125 9.378,10.833 r0 bottom
U17 "NL17SZ125" NZ17SZ125 18.659,10.846 r0 bottom
U18 "NL17SZ125" NZ17SZ125 31.46,11.303 r0 bottom
U19 "NL17SZ125" NZ17SZ125 42.281,11.354 r0 bottom
U20 "NL17SZ125" NZ17SZ125 53.619,11.468 r0 bottom
U21 "NUD3112D" NUD3112D 35.55,2.54 r90 top
Y1 "Comment" CeramicResonator8-16MHZ#1 65.5,51.5 r0 bottom
Y2 "Comment" CeramicResonator8-16MHZ#2 12.522,26.035 r90 bottom
Y3 "8MHz" CeramicResonator8-16MHZ#1 78.613,23.52 r180 bottom

## Footprints (in the part's own frame and the unit in brackets; to place one, negate y for a bottom-side part, rotate by r counter-clockwise, add the part's x,y. Pads: shape width x height; smd on the part's side, far side on the other; paste and mask are expansions set on the pad)
32M1-A_L#1 [mm] "32-Pin Quad Flat No-Lead 0.5 mm Pitch, IPC High Density"
  oval 0.7x0.25 smd: 1(-2.45,1.75) 2(-2.45,1.25) 3(-2.45,0.75) 4(-2.45,0.25) 5(-2.45,-0.25) 6(-2.45,-0.75) 7(-2.45,-1.25) 8(-2.45,-1.75) 17(2.45,-1.75) 18(2.45,-1.25) 19(2.45,-0.75) 20(2.45,-0.25) 21(2.45,0.25) 22(2.45,0.75) 23(2.45,1.25) 24(2.45,1.75)
  oval 0.25x0.7 smd: 9(-1.75,-2.45) 10(-1.25,-2.45) 11(-0.75,-2.45) 12(-0.25,-2.45) 13(0.25,-2.45) 14(0.75,-2.45) 15(1.25,-2.45) 16(1.75,-2.45) 25(1.75,2.45) 26(1.25,2.45) 27(0.75,2.45) 28(0.25,2.45) 29(-0.25,2.45) 30(-0.75,2.45) 31(-1.25,2.45) 32(-1.75,2.45)
  rect 3.3x3.3 smd: 33(0,0)
  silkscreen extent -3.48,-2.6 2.6,2.6, body extent -2.58,-2.58 2.58,2.58, height 1
32M1-A_L#2 [mm] "32-Pin Quad Flat No-Lead 0.5 mm Pitch, IPC High Density"
  oval 0.7x0.25 smd: 1(-2.45,1.75) 2(-2.45,1.25) 3(-2.45,0.75) 4(-2.45,0.25) 5(-2.45,-0.25) 6(-2.45,-0.75) 7(-2.45,-1.25) 8(-2.45,-1.75) 17(2.45,-1.75) 18(2.45,-1.25) 19(2.45,-0.75) 20(2.45,-0.25) 21(2.45,0.25) 22(2.45,0.75) 23(2.45,1.25) 24(2.45,1.75)
  oval 0.25x0.7 smd: 9(-1.75,-2.45) 10(-1.25,-2.45) 11(-0.75,-2.45) 12(-0.25,-2.45) 13(0.25,-2.45) 14(0.75,-2.45) 15(1.25,-2.45) 16(1.75,-2.45) 25(1.75,2.45) 26(1.25,2.45) 27(0.75,2.45) 28(0.25,2.45) 29(-0.25,2.45) 30(-0.75,2.45) 31(-1.25,2.45) 32(-1.75,2.45)
  rect 3.45x3.45 smd: 33(0,0)
  silkscreen extent -3.48,-2.6 2.6,2.6, body extent -2.58,-2.58 2.58,2.58, height 1
0402C-GENERIC [mil]
  rect 25x20 smd: 1(0,0) 2(40,0)
  silkscreen extent -21,-19 61,19
0402C-TBD [mil]
  rect 25x20 smd: 1(0,0) 2(40,0)
  silkscreen extent -21,-19 61,19, body extent 2,-9 39,9, height 19
0402R-TBD [mil]
  rect 25x20 smd: 1(0,0) 2(40,0)
  silkscreen extent -21,-19 61,19, body extent -6,-10 46,10, height 14
470uF/6.3v [mil]
  rect 60x60 hole 30: 1(0,0)
  round 60 hole 30: 2(137.8,0)
  silkscreen extent -87,-157 228,157
0603C-2U2 [mil] "CAPACITOR 0603"
  rect 30x30 smd: 1(0,0) 2(55,0)
  silkscreen extent -23,-23 78,23, body extent -4,-15 59,15, height 19
0603C-TBD [mil] "CAPACITOR 0603 TBD"
  rect 30x30 smd: 1(0,0) 2(55,0)
  silkscreen extent -23,-23 78,23, body extent -4,-15 59,15, height 19
1206C-GENERIC [mil]
  rect 60x60 smd: 1(0,0) 2(135,0)
  silkscreen extent -50,-50 185,50, body extent -8,-29 147,29, height 46
1206FB-GENERIC [mm] "FERRITE BEAD 1206"
  rect 1.25x1.7 smd: 1(0,0) 2(3.429,0)
  silkscreen extent -1.27,-1.27 4.7,1.27, body extent 0.11,-0.81 3.31,0.8, height 1.55
BAT-2 [mm] "Battery; 2 Leads"
  rect 1.5x1.5 hole 0.9: 1(-1.27,0)
  round 1.5 hole 0.9: 2(1.27,0)
  silkscreen extent -2.54,-1.27 2.54,1.27
CeramicResonator8-16MHZ#1 [mm]
  rect 1.4x1.2 smd: 1(0,0) 2(2.2,0) 3(2.2,1.7) 4(0,1.7)
  silkscreen extent -1.1,-1.1 3.4,2.7
CeramicResonator8-16MHZ#2 [mm]
  rect 1.4x1.2 smd: 1(0,0) 2(2.2,0) 3(2.2,1.7) 4(0,1.7)
  L1 lines w0.127: -0.7,-0.7 -0.7,-0.5 -0.9,-0.5
  silkscreen extent -1.1,-1.1 3.4,2.7
DO214AA [mm]
  rect 2x2.5 smd: A(-0.875,0) K(-4.425,0)
  silkscreen extent -5.65,-1.58 0.35,1.55, body extent -5.2,-1.3 0,1.3, height 2.4
ESP8266WROOm-02 [mm]
  rect 2.5x0.92 smd: 1(0,12.9) 2(0,11.4) 3(0,9.9) 4(0,8.4) 5(0,6.9) 6(0,5.4) 7(0,3.9) 8(0,2.4) 9(0,0.9) 10(18.3,0.9) 11(18.3,2.4) 12(18.3,3.9) 13(18.3,5.4) 14(18.3,6.9) 15(18.3,8.4) 16(18.3,9.9) 17(18.3,11.4) 18(18.3,12.9)
  silkscreen extent -2.2,0 20.5,20.25
"Female Plug" [mm]
  rect 2x2.5 smd: 1(9,0)
  rect 3.5x2 smd: 2(6.025,-3.575) 3(6.925,3.575)
  round 1.5 hole 1.5: ""(0,0) ""(5.5,0)
  silkscreen extent -3,-2.5 7.98,2.5
HDR1X2 [mm] "Connector; Header; 2 Position"
  rect 1.5x1.5 hole 0.9: 1(0,0)
  round 1.5 hole 0.9: 2(2.54,0)
  silkscreen extent -1.27,-1.27 3.81,1.27
HDR1X5 [mm] "Connector; Header; 5 Position"
  rect 1.5x1.5 hole 0.9: 1(0,0)
  round 1.5 hole 0.9: 2(2.54,0) 3(5.08,0) 4(7.62,0) 5(10.16,0)
  silkscreen extent -1.27,-1.27 11.43,1.27
HDR1X13 [mm] "Connector; Header; 13 Position"
  rect 1.5x1.5 hole 0.9: 1(0,0)
  round 1.5 hole 0.9: 2(2.54,0) 3(5.08,0) 4(7.62,0) 5(10.16,0) 6(12.7,0) 7(15.24,0) 8(17.78,0) 9(20.32,0) 10(22.86,0) 11(25.4,0) 12(27.94,0) 13(30.48,0)
  silkscreen extent -1.27,-1.27 31.75,1.27
HDR1X24 [mm] "Connector; Header; 24 Position"
  rect 1.5x1.5 hole 0.9: 1(0,0)
  round 1.5 hole 0.9: 2(2.54,0) 3(5.08,0) 4(7.62,0) 5(10.16,0) 6(12.7,0) 7(15.24,0) 8(17.78,0) 9(20.32,0) 10(22.86,0) 11(25.4,0) 12(27.94,0) 13(30.48,0) 14(33.02,0) 15(35.56,0) 16(38.1,0) 17(40.64,0) 18(43.18,0) 19(45.72,0) 20(48.26,0) 21(50.8,0) 22(53.34,0) 23(55.88,0) 24(58.42,0)
  silkscreen extent -1.27,-1.27 59.69,1.27
"Header2x5 1.27mm pitch" [mm]
  round 0.9 hole 0.5: 1(0,0) 2(0,1.27) 3(1.27,0) 4(1.27,1.27) 5(2.54,0) 6(2.54,1.27) 7(3.81,0) 8(3.81,1.27) 9(5.08,0) 10(5.08,1.27)
  silkscreen extent -1.4,-1.4 6.4,2.9
"HiVoltCapacitor 470pF/6kV" [mil]
  round 71 hole 47: 1(0,0) 2(250,3.94)
  silkscreen extent -51,-55 303,63
HX1224-NL [mil] "Pulse trans"
  rect 40x75 smd: 1(0,0) 2(80,0) 3(160,0) 4(280,0) 5(360,0) 6(440,0) 7(440,545) 8(360,545) 9(280,545) 10(160,545) 11(80,545) 12(0,545)
  silkscreen extent -55,-71 488,602
LED-SM [mm]
  rect 0.8x0.8 smd: 1(0,0) 2(1.5,0)
  silkscreen extent -0.9,-0.7 2.5,0.8
MMBT2222 [mm]
  rect 0.8x0.9 smd: B(0,0) C(0.95,2) E(1.9,0)
  silkscreen extent -0.8,-0.75 2.7,2.7
MP1470 [mm] "Power  Supply IC"
  rect 0.6x1.2 smd: 1(0,0) 2(0.95,0) 3(1.95,0) 4(1.9,2.6) 5(0.95,2.6) 6(0,2.6)
  silkscreen extent -1,0.4 2.8,2.1
"Murata 15uH inductor" [mm]
  rect 1.75x3 smd: 1(0,0.025) 2(6.75,0)
  silkscreen extent -0.7,-4.1 7.4,3.9
NUD3112D [mm]
  rect 1x0.7 smd: 1(0,0) 1(0,0) 2(0,-0.95) 3(0,-1.9) 4(2.4,-1.9) 5(2.4,-0.95) 6(2.4,0)
  silkscreen extent -0.3,-2.6 2.4,0.8
NZ17SZ125 [mm] "Buffer"
  rect 0.7x1 smd: 1(0,0) 2(0.95,0) 3(1.9,0) 4(1.9,2.4) 5(0,2.4)
  silkscreen extent -0.9,-0.1 2.9,2.5
QFN24_4X4_N [mm] "QFN, 24-Leads, Body 4x4mm, Pitch 0.5mm, IPC Medium Density"
  oval 0.8x0.25 smd: 1(-2,1.25) 2(-2,0.75) 3(-2,0.25) 4(-2,-0.25) 5(-2,-0.75) 6(-2,-1.25) 13(2,-1.25) 14(2,-0.75) 15(2,-0.25) 16(2,0.25) 17(2,0.75) 18(2,1.25)
  oval 0.25x0.8 smd: 7(-1.25,-2) 8(-0.75,-2) 9(-0.25,-2) 10(0.25,-2) 11(0.75,-2) 12(1.25,-2) 19(1.25,2) 20(0.75,2) 21(0.25,2) 22(-0.25,2) 23(-0.75,2) 24(-1.25,2)
  rect 2.3x2.3 smd: 25(0,0)
  silkscreen extent -3,-2.22 2.22,2.22, body extent -2.07,-2.07 2.07,2.07, height 1
RJ45-8/8 [mil]
  round 70 hole 40: 1(-100,350) 2(1,300) 3(-99,250) 4(0,200) 5(-99,150) 6(1,100) 7(-99,50) 8(0,0)
  round 110 hole 110 unplated: A(-340,-55) B(-340,405)
  silkscreen extent -650,-125 75,475
SO8_L [mm] "SOIC, 8-Leads, Body 4.9x3.9mm, Pitch 1.27mm, IPC High Density"
  oval 1.9x0.6 smd: 1(-2.35,1.905) 2(-2.35,0.635) 3(-2.35,-0.635) 4(-2.35,-1.905) 5(2.35,-1.905) 6(2.35,-0.635) 7(2.35,0.635) 8(2.35,1.905)
  silkscreen extent -2.47,-2.5 1,2.88, body extent -2,-2.5 2,2.5, height 1.75
SOD-123 [mm]
  rect 0.9x1.2 smd: A(3.048,0) K(0,0)
  silkscreen extent -0.64,-1.02 3.68,1.02, body extent -0.18,-0.87 3.3,0.87, height 0.79
SOIC-5 [mm]
  rect 1x0.7 smd: 1(0,0) 2(0,-0.95) 3(0,-1.9) 4(2.4,-1.9) 5(2.4,-0.95) 6(2.4,0)
  silkscreen extent -0.3,-2.6 2.4,0.8
SOT23-BCE [mil]
  rect 36x36 smd: B(0,0) E(0,-75)
  rect 50x36 smd: C(80,-38)
  silkscreen extent -25,-100 110,25, body extent -3,-95 94,20, height 41
SOT23-DIODE [mm] "SOT23 WITH A/K PIN NUMBERS"
  rect 0.9x0.7 smd: A(0,0) K(2.032,-0.965) NC(0,-1.9)
  silkscreen extent -0.63,-2.54 2.8,0.64, body extent -0.1,-2.41 2.34,0.51, height 1.33
TESTPOINT [mil]
  round 60 hole 30: 1(0,0)
  silkscreen extent -50,-50 70,50, body extent -54,-52 54,52, height 254
TQFP-PT64_N [mm] "Thin QFP, 64-Leads, Body 10x10mm, Pitch 0.5mm, IPC Medium Density"
  oval 1.8x0.3 smd: 1(-5.55,3.75) 2(-5.55,3.25) 3(-5.55,2.75) 4(-5.55,2.25) 5(-5.55,1.75) 6(-5.55,1.25) 7(-5.55,0.75) 8(-5.55,0.25) 9(-5.55,-0.25) 10(-5.55,-0.75) 11(-5.55,-1.25) 12(-5.55,-1.75) 13(-5.55,-2.25) 14(-5.55,-2.75) 15(-5.55,-3.25) 16(-5.55,-3.75) 33(5.55,-3.75) 34(5.55,-3.25) 35(5.55,-2.75) 36(5.55,-2.25) 37(5.55,-1.75) 38(5.55,-1.25) 39(5.55,-0.75) 40(5.55,-0.25) 41(5.55,0.25) 42(5.55,0.75) 43(5.55,1.25) 44(5.55,1.75) 45(5.55,2.25) 46(5.55,2.75) 47(5.55,3.25) 48(5.55,3.75)
  oval 0.3x1.8 smd: 17(-3.75,-5.55) 18(-3.25,-5.55) 19(-2.75,-5.55) 20(-2.25,-5.55) 21(-1.75,-5.55) 22(-1.25,-5.55) 23(-0.75,-5.55) 24(-0.25,-5.55) 25(0.25,-5.55) 26(0.75,-5.55) 27(1.25,-5.55) 28(1.75,-5.55) 29(2.25,-5.55) 30(2.75,-5.55) 31(3.25,-5.55) 32(3.75,-5.55) 49(3.75,5.55) 50(3.25,5.55) 51(2.75,5.55) 52(2.25,5.55) 53(1.75,5.55) 54(1.25,5.55) 55(0.75,5.55) 56(0.25,5.55) 57(-0.25,5.55) 58(-0.75,5.55) 59(-1.25,5.55) 60(-1.75,5.55) 61(-2.25,5.55) 62(-2.75,5.55) 63(-3.25,5.55) 64(-3.75,5.55)
  silkscreen extent -5.67,4.33 -5.42,4.57, body extent -5,-5 5,5, height 1.2

## Part data
BT1: library part Battery, "Multicell Battery"
C7 C8 C9 C10 C11 C12 C13 C14 C15 C16 C28 C37 C39 C40 C41 C44 C45 C59 C64 C81 C93 C99 C111 C117: library part Cap, "Capacitor"
C17 C18 C19 C20 C21 C23 C25 C26 C27 C29 C30 C32 C33 C35 C36 C42 C43 C47 C48 C50 C51 C52 C53 C54 C56 C57 C60 C61 C62 C63 C65 C66 C67 C68 C69 C70 C71 C72 C73 C74 C75 C77 C79 C80 C82 C83 C84 C85 C86 C87 C88 C89 C90 C91 C94 C95 C96 C97 C98 C100 C101 C102 C103 C104 C105 C106 C107 C108 C110 C112 C113 C114 C115 C116 C118 C119 C120 C121 C122 C123 C124: library part 0805C-18PF-50V-C0G-JOH, "CAPACITOR 0805 CERAMIC"
C31: "Polarized Capacitor (Surface Mount)"
D2 D7 D8 D9: library part LED2, "Typical RED, GREEN, YELLOW, AMBER GaAs LED"
D5: library part 1N4001, "1N4001"
D6: library part "D Zener", "Zener Diode"
D14 D15: "Typical RED, GREEN, YELLOW, AMBER GaAs LED"
J1: "GENERIC RJ45 CONNECTOR 8 PIN"
L2: library part Inductor, "Inductor"
L3: library part 1U-1239AS-TOKO, "1239AS-H-1R0N"
L4 L5 L6 L7 L8 L9 L10 L11 L12 L13 L14 L15 L16 L17 L18 L19 L20 L21 L22 L23 L24 L25 L26 L27 L28 L29 L30 L31 L32 L33: library part FerrBeads/ILBB
P1 P4: "Header, 5-Pin"
P2: "Header, 24-Pin"
P3: "Header, 13-Pin"
P5 P6: "Header, 2-Pin"
P5: "Header, 5-Pin, Dual row"
PJ1: "Low Voltage Power Supply Connector"
Q1: library part PNP-GENERIC, "GENERIC PNP BIPOLAR TRANSISTOR"
R3 R4 R7 R9 R10 R11 R12 R13 R14 R15 R17 R18 R19 R20 R21 R22 R23 R24 R25 R26 R27 R28 R29 R30 R31 R32 R33 R34 R36 R37 R38 R39 R40 R41 R42 R45 R46 R47 R49 R50 R53 R55 R57 R58 R59 R61 R63 R64 R66 R67 R68 R72 R74 R75 R77 R78 R80 R82 R83 R85 R87 R88 R89 R90 R92 R94 R95 R96 R101 R103 R104 R106 R109 R110 R111 R112 R113 R114 R115 R116 R117 R121: library part Res3, "Resistor"
TP3 TP4 TP5 TP6 TP7 TP8 TP9 TP10 TP18 TP19 TP20 TP21 TP22 TP23 TP24 TP25 TP26 TP27 TP28 TP29 TP30 TP31 TP32 TP33 TP34: "TESTPOINT SCOPE GRABBER"
TrET1: library part hx1224nl
U5: library part PIC32MX534F064F
U7: library part 23LCV1024
U16 U17 U18 U19 U20: "Tristate Single Buffer"
U21: library part NUD312D
Y3: library part 12MC-HC49US-7MM, "12MHz CRYSTAL HC49US SHORT BODY"

## Free pads (board coordinates)
  round 2.286 hole 1.524: 0(50.571,47.346) 0(53.34,47.346) 0(55.931,47.295)
  round 0.889 hole 0.508: 0(88.138,9.119) 0(90.373,9.119)
  round 1.524 hole 0.762: 0(104.216,9.068) 1(104.496,6.452) 1(104.75,14.148) 2(103.937,12.319) 3(102.819,8.484) 4(85.547,6.223) 4(101.727,14.529) 6(85.547,9.398) 7(106.045,10.084) 8(104.927,4.242) 9(101.625,10.77)
  round 0.813 hole 0.508: 6(11.074,17.043) 7(22.145,16.956) 8(33.249,16.967) 9(44.192,16.981) 10(55.115,16.981)

## Via types
v1: diameter 0.559, hole 0.305, L1 to L4, 391 vias
v2: diameter 0.813, hole 0.508, L1 to L4, tented top, 19 vias
v3: diameter 0.559, hole 0.305, L1 to L4, tented top, 4 vias
v4: diameter 0.813, hole 0.457, L1 to L4, tented top, 1 vias

## Nets (pads, with @x,y where several pads share a name; then routed paths per layer and width w, separated by ;. In a path a pad name is that pad's centre, name@x,y a point inside that pad or via, vN(x,y) a via of type N, cw(c..) or ccw(c..) an arc to the next point about the centre after c; other vN are vias at no path point)
GND: BT1.2 C8.2 C9.2 C10.2 C11.2 C12.2 C13.2 C14.2 C15.2 C16.1 C17.2 C18.2 C19.2 C20.2 C21.2 C22.2 C23.2 C24.2 C25.2 C26.2 C27.2 C28.2 C29.2 C30.2 C31.2 C32.2 C33.2 C34.1 C36.2 C37.1 C38.2 C39.2 C40.1 C41.1 C42.2 C44.1 C45.1 C46.2 C47.2 C50.2 C51.2 C52.1 C53.2 C56.2 C57.2 C59.2 C60.2 C61.2 C62.2 C63.2 C64.2 C67.2 C69.2 C70.2 C71.2 C72.2 C74.2 C75.2 C77.2 C78.2 C79.2 C80.2 C81.2 C82.2 C86.2 C87.2 C88.2 C89.2 C91.2 C93.2 C95.2 C96.2 C97.2 C98.1 C99.2 C100.2 C104.2 C105.2 C106.2 C107.2 C108.2 C110.1 C111.2 C112.2 C113.2 C115.2 C116.2 C117.2 C121.2 C122.2 C123.2 C124.2 C125.1 D6.A D7.2 D14.2 D15.2 J7.1 L5.1 L6.1 L8.1 L9.1 L11.1 L12.1 L14.1 L15.1 L17.1 L18.1 L20.1 L21.1 L23.1 L24.1 L26.1 L27.1 L29.1 L30.1 L32.1 L33.1 M2.1 M2.11 M2.12 P1.5 P2.11 P2.12 P3.11 P3.12 P3.13 P4.4 P4.5 P5.1@49.936,42.596 P5.2@42.494,3.785 P6.2 pad.0@50.571,47.346 pad.0@53.34,47.346 pad.0@55.931,47.295 pad.0@88.138,9.119 pad.0@104.216,9.068 pad.1 pad.2 pad.3 pad.4 pad.6 pad.7 pad.8 pad.9 pad.10 PJ1.2 PJ1.3 Q2.E R7.1 R15.1 R16.1 R21.1 R37.1 TS1.5 U2.1 U3.25 U4.3 U4.18 U4.20 U4.22 U4.25 U4.26 U4.33 U5.9 U5.20 U5.25 U5.41 U6.3 U6.18 U6.20 U6.22 U6.25 U6.26 U6.33 U7.3 U7.4 U8.3 U8.18 U8.20 U8.22 U8.25 U8.26 U8.33 U9.3 U9.18 U9.20 U9.22 U9.25 U9.26 U9.33 U10.3 U10.18 U10.20 U10.22 U10.25 U10.26 U10.33 U11.1 U11.4 U12.1 U12.4 U13.1 U13.4 U14.1 U14.4 U15.1 U15.4 U16.3 U17.3 U18.3 U19.3 U20.3 U21.1 U21.5 Y1.2 Y1.4 Y2.2 Y3.2 Y3.4 | length 313.8
  L1 w0.254: v1(5.309,14.503) 5.359,14.554 5.359,14.986 6.35,14.986 C52.1@6.35,15.697 ; U4.33@11.824,16.293 U4.3@13.524,16.293 ; C71.2@16.916,15.773 16.916,16.891 C69.2@16.942,16.916 ; U6.22@19.695,16.206 20.468,16.206 20.673,16.411 21.6,16.411 pad.7@22.145,16.956 ; U6.20@19.695,17.206 pad.7@21.895,17.206 ; U6.18@19.695,18.206 20.895,18.206 U6.33@20.945,18.156 ; U6.25@20.395,14.506 U6.26@20.895,14.506 20.895,15.706 v2(20.945,15.756) ; v2(23.345,15.756) 22.895,16.206 U6.3@24.595,16.206 ; v1(37.49,18.339) 37.49,18.237 37.719,18.009 C107.2@38.303,18.009 ; C106.2@38.278,19.101 38.278,18.034 C107.2@38.303,18.009 ; 38.303,15.138 C93.2@38.303,15.977 C100.2@38.303,16.967 C107.2@38.303,18.009 ; U9.22@41.742,16.231 42.621,16.231 42.992,15.86 v2(42.992,15.781) 42.942,15.731 U9.26@42.942,14.531 U9.25@42.442,14.531 42.113,14.202 C91.2@42.113,13.487 ; U9.20@41.742,17.231 43.942,17.231 v2(42.992,18.181) 42.398,18.181 42.348,18.231 U9.18@41.742,18.231 ; v1(44.806,11.379) v1@44.831,11.379 ; v2(45.392,15.781) 44.942,16.231 U9.3@46.642,16.231 ; L30.1@47.981,31.852 48.031,31.801 v1(48.87,31.801) ; v1(48.209,19.533) 48.377,19.365 49.063,19.365 C124.2@49.378,19.05 C122.2@49.378,17.882 49.378,16.764 C121.2@49.403,16.739 49.403,15.545 C116.2@49.378,15.519 C111.2@49.378,14.351 C115.2@49.378,13.208 C108.2@49.378,12.09 48.793,11.506 v1(48.616,11.506) ; U10.22@52.665,16.231 53.517,16.231 53.915,15.833 v2(53.915,15.781) 53.865,15.731 U10.26@53.865,14.531 U10.25@53.365,14.531 52.86,14.531 52.68,14.351 C110.1@52.68,13.614 52.705,13.589 C117.2@52.705,12.522 ; U10.20@52.665,17.231 53.354,17.231 53.53,17.408 55.292,17.408 55.542,17.158 55.542,16.804 U10.33@55.417,16.679 ; U10.18@52.665,18.231 53.372,18.231 53.422,18.181 v2(53.915,18.181) ; v2(56.315,15.781) 56.765,16.231 U10.3@57.565,16.231 ; v1(58.852,3.734) 58.867,3.719 U11.1@58.867,2.502 ; v1(60.706,3.785) 60.767,3.846 U11.4@60.767,4.902 ; v1(63.906,3.607) 63.937,3.576 U12.1@63.937,2.515 ; v1(65.837,3.835) U12.4@65.837,4.915 ; U7.3@66.103,23.8 U7.4@66.103,22.53 67.386,22.53 v1(67.412,22.555) ; 66.624,52.248 67.395,52.248 67.7,52.553 67.7,53.7 67.4,54 C13.2@67.1,54 ; v1(69.012,3.581) 69.012,3.531 69.027,3.515 U13.1@69.027,2.502 ; v1(69.2,53.1) 69.216,53.084 C16.1@70.1,53.084 C17.2@71.1,53.084 R37.1@72.2,53.084 ; v1(70.917,3.886) 70.927,3.896 U13.4@70.927,4.902 ; U14.1@74.082,2.489 74.117,2.525 v1(74.117,3.607) ; R15.1@75.209,11.938 v1(75.209,12.598) ; v1(75.982,4.023) U14.4@75.982,4.889 ; v1(79.131,3.642) 79.136,3.642 U15.1@79.136,2.528 ; v1(81.026,3.937) 81.026,4.917 U15.4@81.036,4.928 ; M2.12@89.682,18.415 89.682,16.818 90.6,15.9 90.6,14.817 89.804,14.021 R21.1@89.789,14.021
  L1 w0.305: v1(4.674,17.196) 5.359,17.196 C51.2@5.359,18.059 C53.2@5.359,19.152 ; L9.1@5.131,31.852 5.563,31.42 v1(6.274,31.42) ; v1(5.182,36.906) 5.182,35.89 L5.1@5.105,35.814 L6.1@6.426,35.814 ; U4.22@8.624,16.293 9.424,16.293 v2(9.874,15.843) 9.55,15.519 9.55,14.834 9.779,14.605 U4.25@9.374,14.595 ; U4.20@8.624,17.293 10.824,17.293 pad.6@11.074,17.043 ; U4.18@8.624,18.293 9.824,18.293 v2(9.874,18.243) ; L8.1@11.659,34.417 12.573,34.417 v1(12.624,34.468) ; U4.33@11.824,16.293 v2(12.274,15.843) ; v1(15.418,35.814) 15.418,35.789 L11.1@16.459,35.789 ; v1(16.129,17.78) 16.18,17.729 16.18,17.297 16.383,17.094 C69.2@16.942,17.094 ; L15.1@16.51,31.826 15.723,31.826 15.494,32.055 15.494,34.823 L11.1@16.459,35.789 ; C69.2@16.942,16.916 C69.2@16.942,17.094 ; C70.2@16.942,19.05 16.942,18.034 C69.2@16.942,17.094 ; L12.1@17.831,35.789 L11.1@16.459,35.789 ; v1(18.948,13.335) v1@18.974,13.36 ; pad.7@21.895,17.206 pad.7@22.145,16.956 ; L14.1@23.089,35.89 23.901,35.89 v1(23.927,35.916) ; v1(26.391,30.378) 26.416,30.353 L21.1@27.229,30.353 ; v1(26.594,35.687) 26.619,35.712 L17.1@27.305,35.712 L18.1@28.727,35.712 ; v1(27.788,19.812) C89.2@27.788,19.177 C87.2@27.788,18.136 C88.2@27.788,17.12 27.788,16.104 C86.2@27.813,16.078 ; U8.22@30.799,16.217 32.499,16.217 pad.8@33.249,16.967 ; U8.20@30.799,17.217 32.999,17.217 pad.8@33.249,16.967 ; U8.18@30.799,18.217 31.999,18.217 v2(32.049,18.167) ; U8.25@31.499,14.517 U8.26@31.999,14.517 31.999,15.717 v2(32.049,15.767) ; L20.1@34.163,35.738 35.027,35.738 v1(35.052,35.763) ; U8.3@35.699,16.217 33.999,16.217 pad.8@33.249,16.967 ; v1(37.389,35.712) L23.1@38.379,35.712 ; v1(37.516,31.648) L27.1@38.405,31.648 ; L23.1@38.405,35.687 L24.1@39.827,35.687 ; C91.2@42.113,13.487 C91.2@42.164,13.487 ; L26.1@46.126,35.763 L33.1@47.777,35.763 48.489,35.763 v1(48.489,35.789) ; L32.1@52.527,35.712 52.959,36.144 54.432,36.144 54.864,35.712 L29.1@55.372,35.712 56.286,35.712 56.312,35.687 v1(56.413,35.687) ; D14.2@65.684,35.052 65.684,36.805 D15.2@65.659,36.83 65.659,38.583 P3.12@66.802,39.726 ; v1(98.682,34.9) M2.1@98.682,36.715
  L1 w0.381: v1(29.54,5.893) 30.937,5.893 31.41,5.42 TS1.5@31.41,4.94 ; U21.5@36.5,4.94 v1(36.5,5.817) ; v1(64.922,52.426) 65.1,52.248 66.624,52.248 ; P3.13@69.342,39.726 69.342,41.097 70.04,41.796 C24.2@70.269,41.796 ; 84.887,2.489 86.081,1.295 v1(87.452,1.295) ; v1(87.579,7.798) 87.588,7.789 U2.1@88.346,7.789 ; R7.1@89.637,3.632 89.814,3.632 90.272,3.175 ; v1(90.881,3.226) 90.856,3.226 90.805,3.175 90.25,3.175 89.662,3.763 89.662,4.648 91.034,4.648 v1(91.084,4.597)
  L1 w0.762: v1(34.569,2.54) U21.1@35.55,2.54 ; P5.1@49.936,42.596 49.486,42.145 PJ1.2@42.525,42.145 43.425,43.045 PJ1.3@43.425,49.295 46.285,49.295 48.235,47.346 pad.0@50.571,47.346 pad.0@53.34,47.346 ; C22.2@52.883,50.19 53.34,49.733 pad.0@53.34,47.346 ; pad.0@55.931,47.295 55.88,47.346 pad.0@53.34,47.346 ; v1(88.175,20.142) 88.182,20.135 M2.11@88.182,18.415 M2.12@89.682,18.415 ; C10.2@94.209,6.198 95.7,6.198 ; v1(95.7,7.6) 95.7,6.198 ; C8.2@97.231,6.198 95.7,6.198
  L2 w0.254: v1@79.045,3.556 v1(79.131,3.642)
  L2 w0.305: v1@26.568,35.687 v1(26.594,35.687)
  L3 w0.254: v1@65.735,13.03 v1(65.786,13.03)
  L4 w0.203: 65.477,32.944 65.86,32.561 U5.20@65.86,30.509
  L4 w0.254: C41.1@6.401,13.335 7.239,13.335 C29.2@7.264,13.36 ; C125.1@11.227,27.686 11.973,27.686 Y2.2@12.522,28.235 ; v1@12.522,29.972 v1(12.624,30.074) ; C63.2@16.891,16.332 16.916,16.307 C57.2@16.916,15.265 ; v1(37.49,18.339) 37.719,18.567 C105.2@38.278,18.567 38.303,18.542 C104.2@38.303,17.501 C97.2@38.303,16.459 38.278,16.434 C95.2@38.278,14.224 ; U19.3@44.181,11.354 44.831,11.354 v1(44.806,11.379) ; v1(48.209,19.533) 48.306,19.436 48.306,18.674 49.098,17.882 C123.2@49.378,17.882 ; C113.2@54.762,12.827 55.118,12.471 56.439,12.471 ; U20.3@55.519,11.468 55.634,11.582 56.134,11.582 56.439,11.887 56.439,12.471 ; v1(58.09,14.122) 57.302,13.335 C112.2@57.302,13.183 57.302,12.903 56.871,12.471 56.439,12.471 ; U5.9@63.246,25.184 64.173,25.184 v1(64.211,25.146) ; C67.2@64.389,13.614 65.456,13.614 C45.1@65.634,13.792 65.634,13.183 v1(65.786,13.03) ; Y1.4@65.999,49.532 65.999,49.768 Y1.2@67.285,51.054 ; v1(68.301,31.902) 68.351,31.852 68.351,31.648 68.36,31.64 U5.25@68.36,30.509 ; v1(68.616,63.184) C15.2@69.6,63.184 69.616,63.2 C23.2@70.7,63.2 70.715,63.2 71.731,64.216 C19.2@71.8,64.216 ; v1(68.7,59.4) 68.716,59.416 C12.2@69.5,59.416 C14.2@70.6,59.416 ; v1(69.444,16.154) C46.2@69.444,15.418 C38.2@70.739,15.418 C40.1@71.958,15.418 73.203,15.418 73.177,15.443 v1(73.177,16.053) ; v1(69.9,61.7) C18.2@70.5,61.7 ; v1(71.6,55.3) 71.6,55.2 71.5,55.2 C44.1@70.5,56.2 70.515,56.2 71.515,57.2 C21.2@71.6,57.2 ; v1@72.111,25.578 72.111,25.222 72.243,25.09 ; v1(72.2,60) 72.7,60 C11.2@72.7,60.684 ; 72.245,25.09 72.626,24.709 U5.41@73.66,24.709 ; C34.1@73.228,15.392 73.736,15.392 74.27,14.859 Q2.E@75.184,14.859 ; C42.2@76.098,21.666 76.098,20.447 76.124,20.472 76.302,20.295 v1(76.403,20.295) ; Y3.2@76.159,23.548 76.659,23.548 78.234,25.122 78.033,25.324 77.572,25.324 77.572,26.365 C47.2@76.962,26.975 76.962,27.965 76.429,28.499 v1(76.454,28.524) ; v1(78.13,12.141) R16.1@78.13,12.852 ; D6.A@83.231,10.871 83.231,9.657 83.947,8.941 86.436,8.941 v1(87.579,7.798)
  L4 w0.305: v1@5.029,36.906 v1(5.182,36.906) ; C28.2@5.334,15.697 C36.2@5.334,16.535 ; C32.2@5.334,17.78 C32.2@5.359,17.755 ; C36.2@5.359,16.561 C36.2@5.334,16.535 ; C32.2@5.359,17.805 4.953,17.805 4.674,17.526 v1(4.674,17.196) 4.648,17.17 4.648,16.637 4.75,16.535 C36.2@5.334,16.535 ; C29.2@7.214,13.31 C29.2@7.239,13.335 ; v1(7.264,13.945) C29.2@7.264,13.36 7.264,12.802 7.468,12.598 C30.2@7.468,12.268 ; v1(9.296,12.649) 9.347,12.7 C39.2@9.347,13.335 ; C27.2@11.608,12.192 11.608,12.167 11.278,11.836 U16.3@11.278,10.833 12.357,10.833 12.624,11.1 v1(12.624,11.278) 12.777,11.278 13.31,11.811 13.31,12.7 C33.2@12.649,13.36 ; v1(15.646,13.843) 15.674,13.843 15.902,14.072 C56.2@16.891,14.072 ; v1(16.129,17.78) 16.281,17.628 16.281,17.374 C59.2@16.891,17.374 ; C63.2@16.891,16.332 C59.2@16.891,17.374 ; C62.2@16.891,18.669 C59.2@16.891,17.374 ; C37.1@17.932,13.157 18.771,13.157 v1(18.948,13.335) 19.71,13.335 C64.2@19.736,13.36 C60.2@19.736,12.421 19.736,12.04 19.99,11.786 21.285,11.786 21.768,12.268 C61.2@21.895,12.268 ; v1(20.549,9.474) 20.559,9.484 U17.3@20.559,10.846 ; v1(26.391,30.378) v1@26.391,30.404 ; C78.2@27.788,14.097 27.788,15.545 C74.2@27.813,15.57 27.788,15.596 C75.2@27.788,16.586 C80.2@27.788,17.628 C82.2@27.788,18.644 v1(27.788,19.812) ; C79.2@31.445,12.929 31.445,15.164 v2(32.049,15.767) ; C81.2@33.706,12.497 33.36,12.151 33.259,11.481 35.484,11.481 ; C77.2@35.763,11.481 36.347,11.481 v1(36.373,11.506) ; v1(40.691,12.979) 40.691,12.598 40.818,12.471 C96.2@42.215,12.471 ; C99.2@47.142,12.421 47.142,12.04 47.676,11.506 v1(48.616,11.506) ; v1(64.694,32.918) 64.719,32.944 65.477,32.944 ; v1(72.085,25.578) 72.085,25.552 v1@72.111,25.578
  L4 w0.381: v1(62.205,47.701) 64.719,47.701 65.417,48.399 66.551,48.399 66.551,48.537 65.999,49.088 ; v1(64.922,52.426) 65.151,52.654 65.557,52.654 65.913,53.01 C25.2@66.472,53.01 ; Y1.2@67.285,51.054 68.021,51.054 68.199,51.232 Y1.2@68.145,51.232
  L4 w0.508: Y2.2@12.522,28.235 v1@12.522,29.972
  other v2: 20.93,18.171 23.345,18.156 34.449,18.167 45.392,18.181 56.315,18.181 12.274,18.243
  other v3: 68.967,46.549 70.167,46.549 68.967,47.749 70.167,47.749
  other v4: 34.449,15.767